# Altium PCB HIGHSPEED_v0.PcbDoc (part 1 of 2)
Units mil, origin at the board's own origin, x right, y up, seen from the top; angles counter-clockwise.
Board outline 3290 x 2886.02 mil, 6 copper layers (Top Layer, GND_1, Signal Layer 1, POWER, GND_2, Bottom Layer), stack 61.654 mil thick; 160 components, 145 nets, 569 pads, 305 vias.
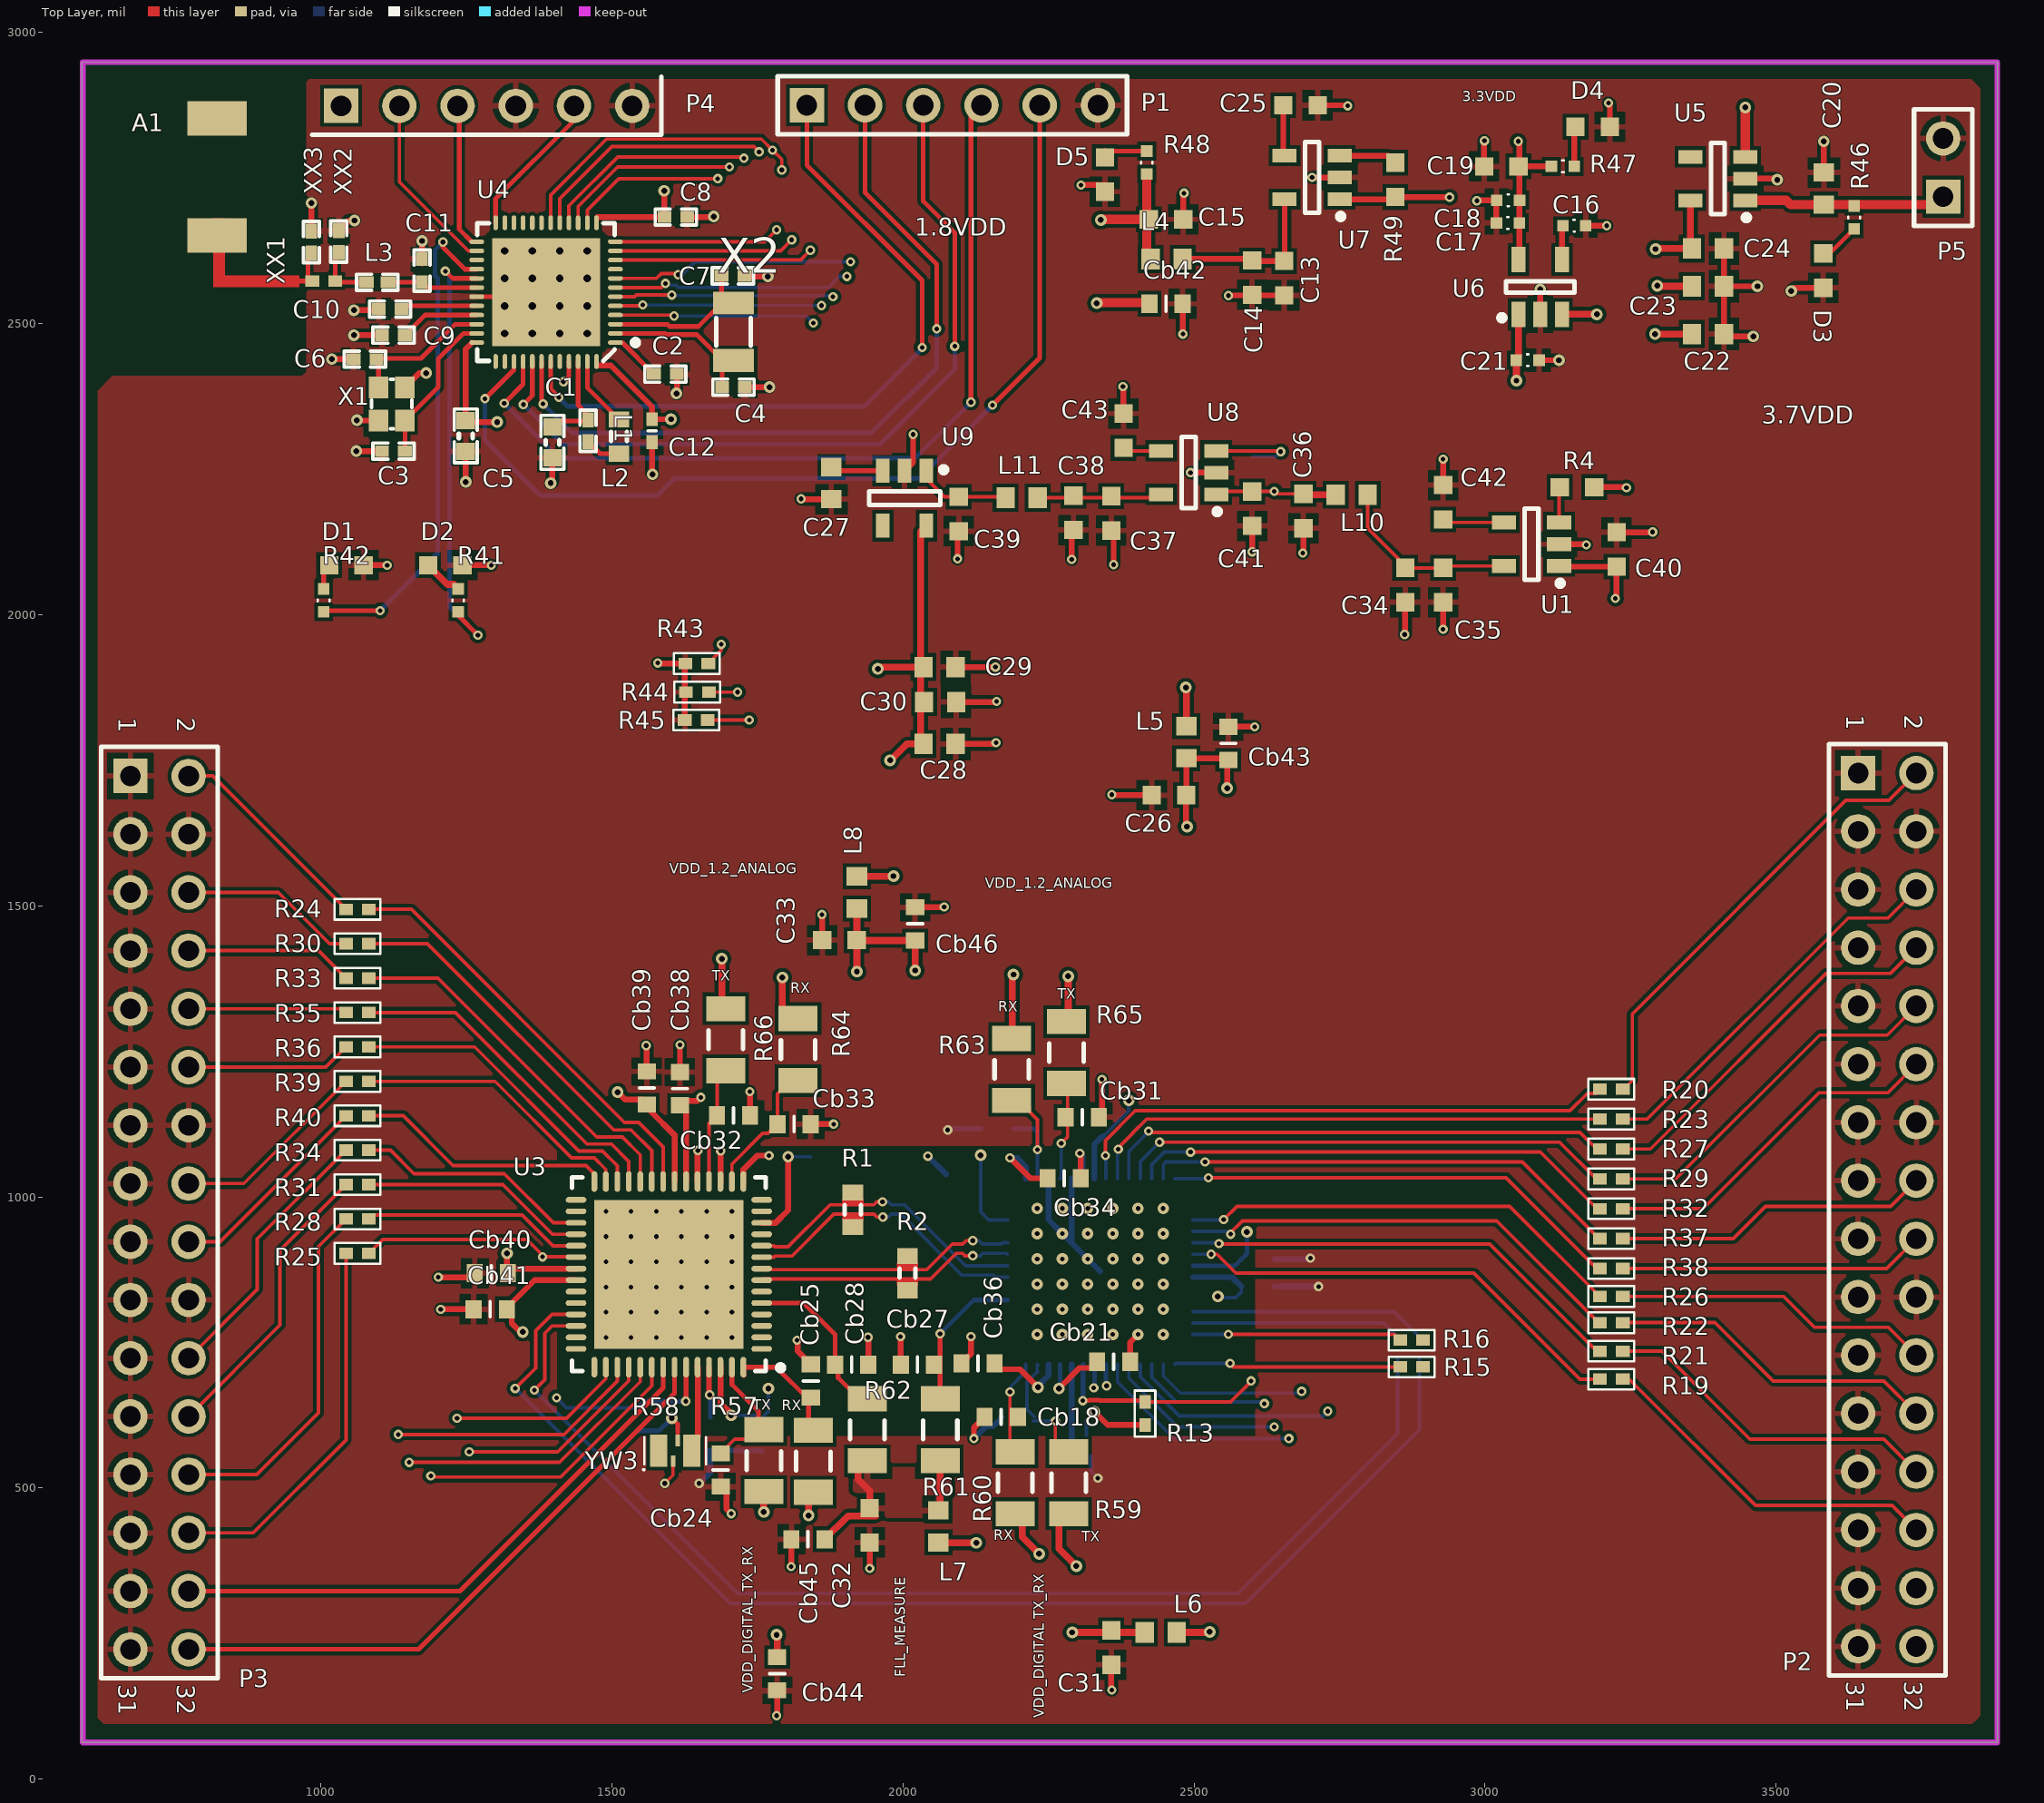
[diagram p0: Top Layer view]
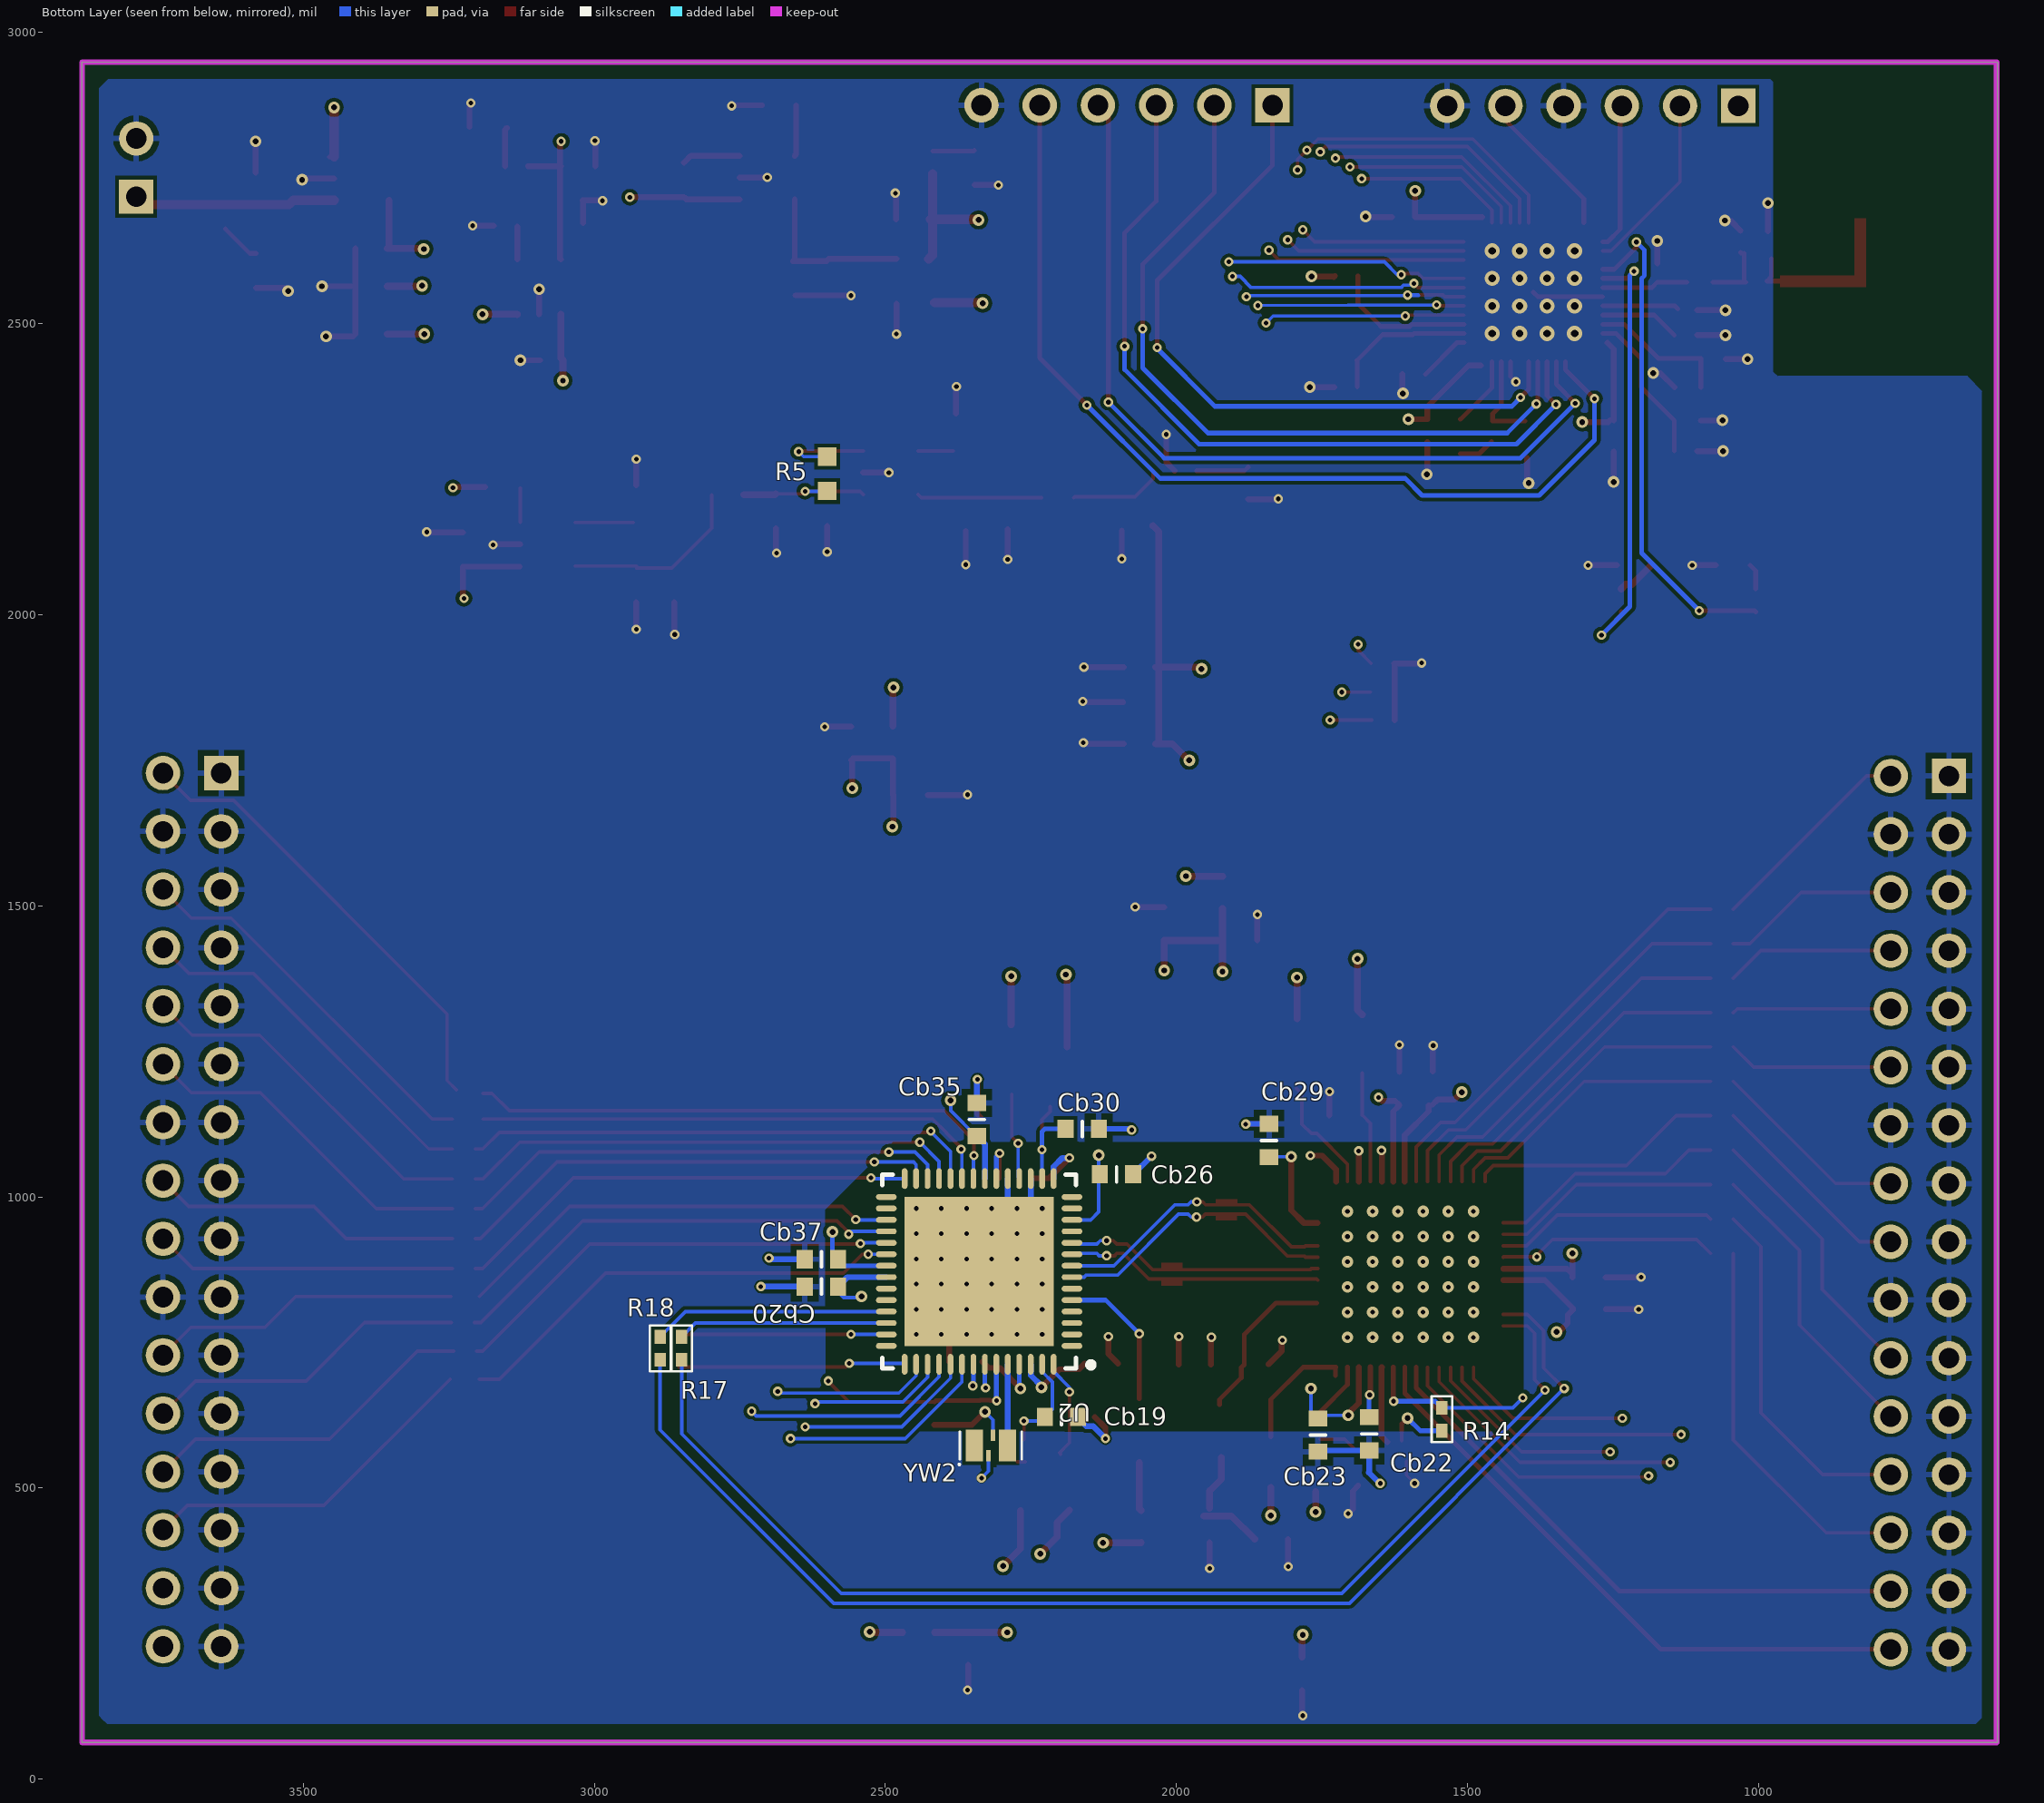
[diagram p1: Bottom Layer view, seen from below]
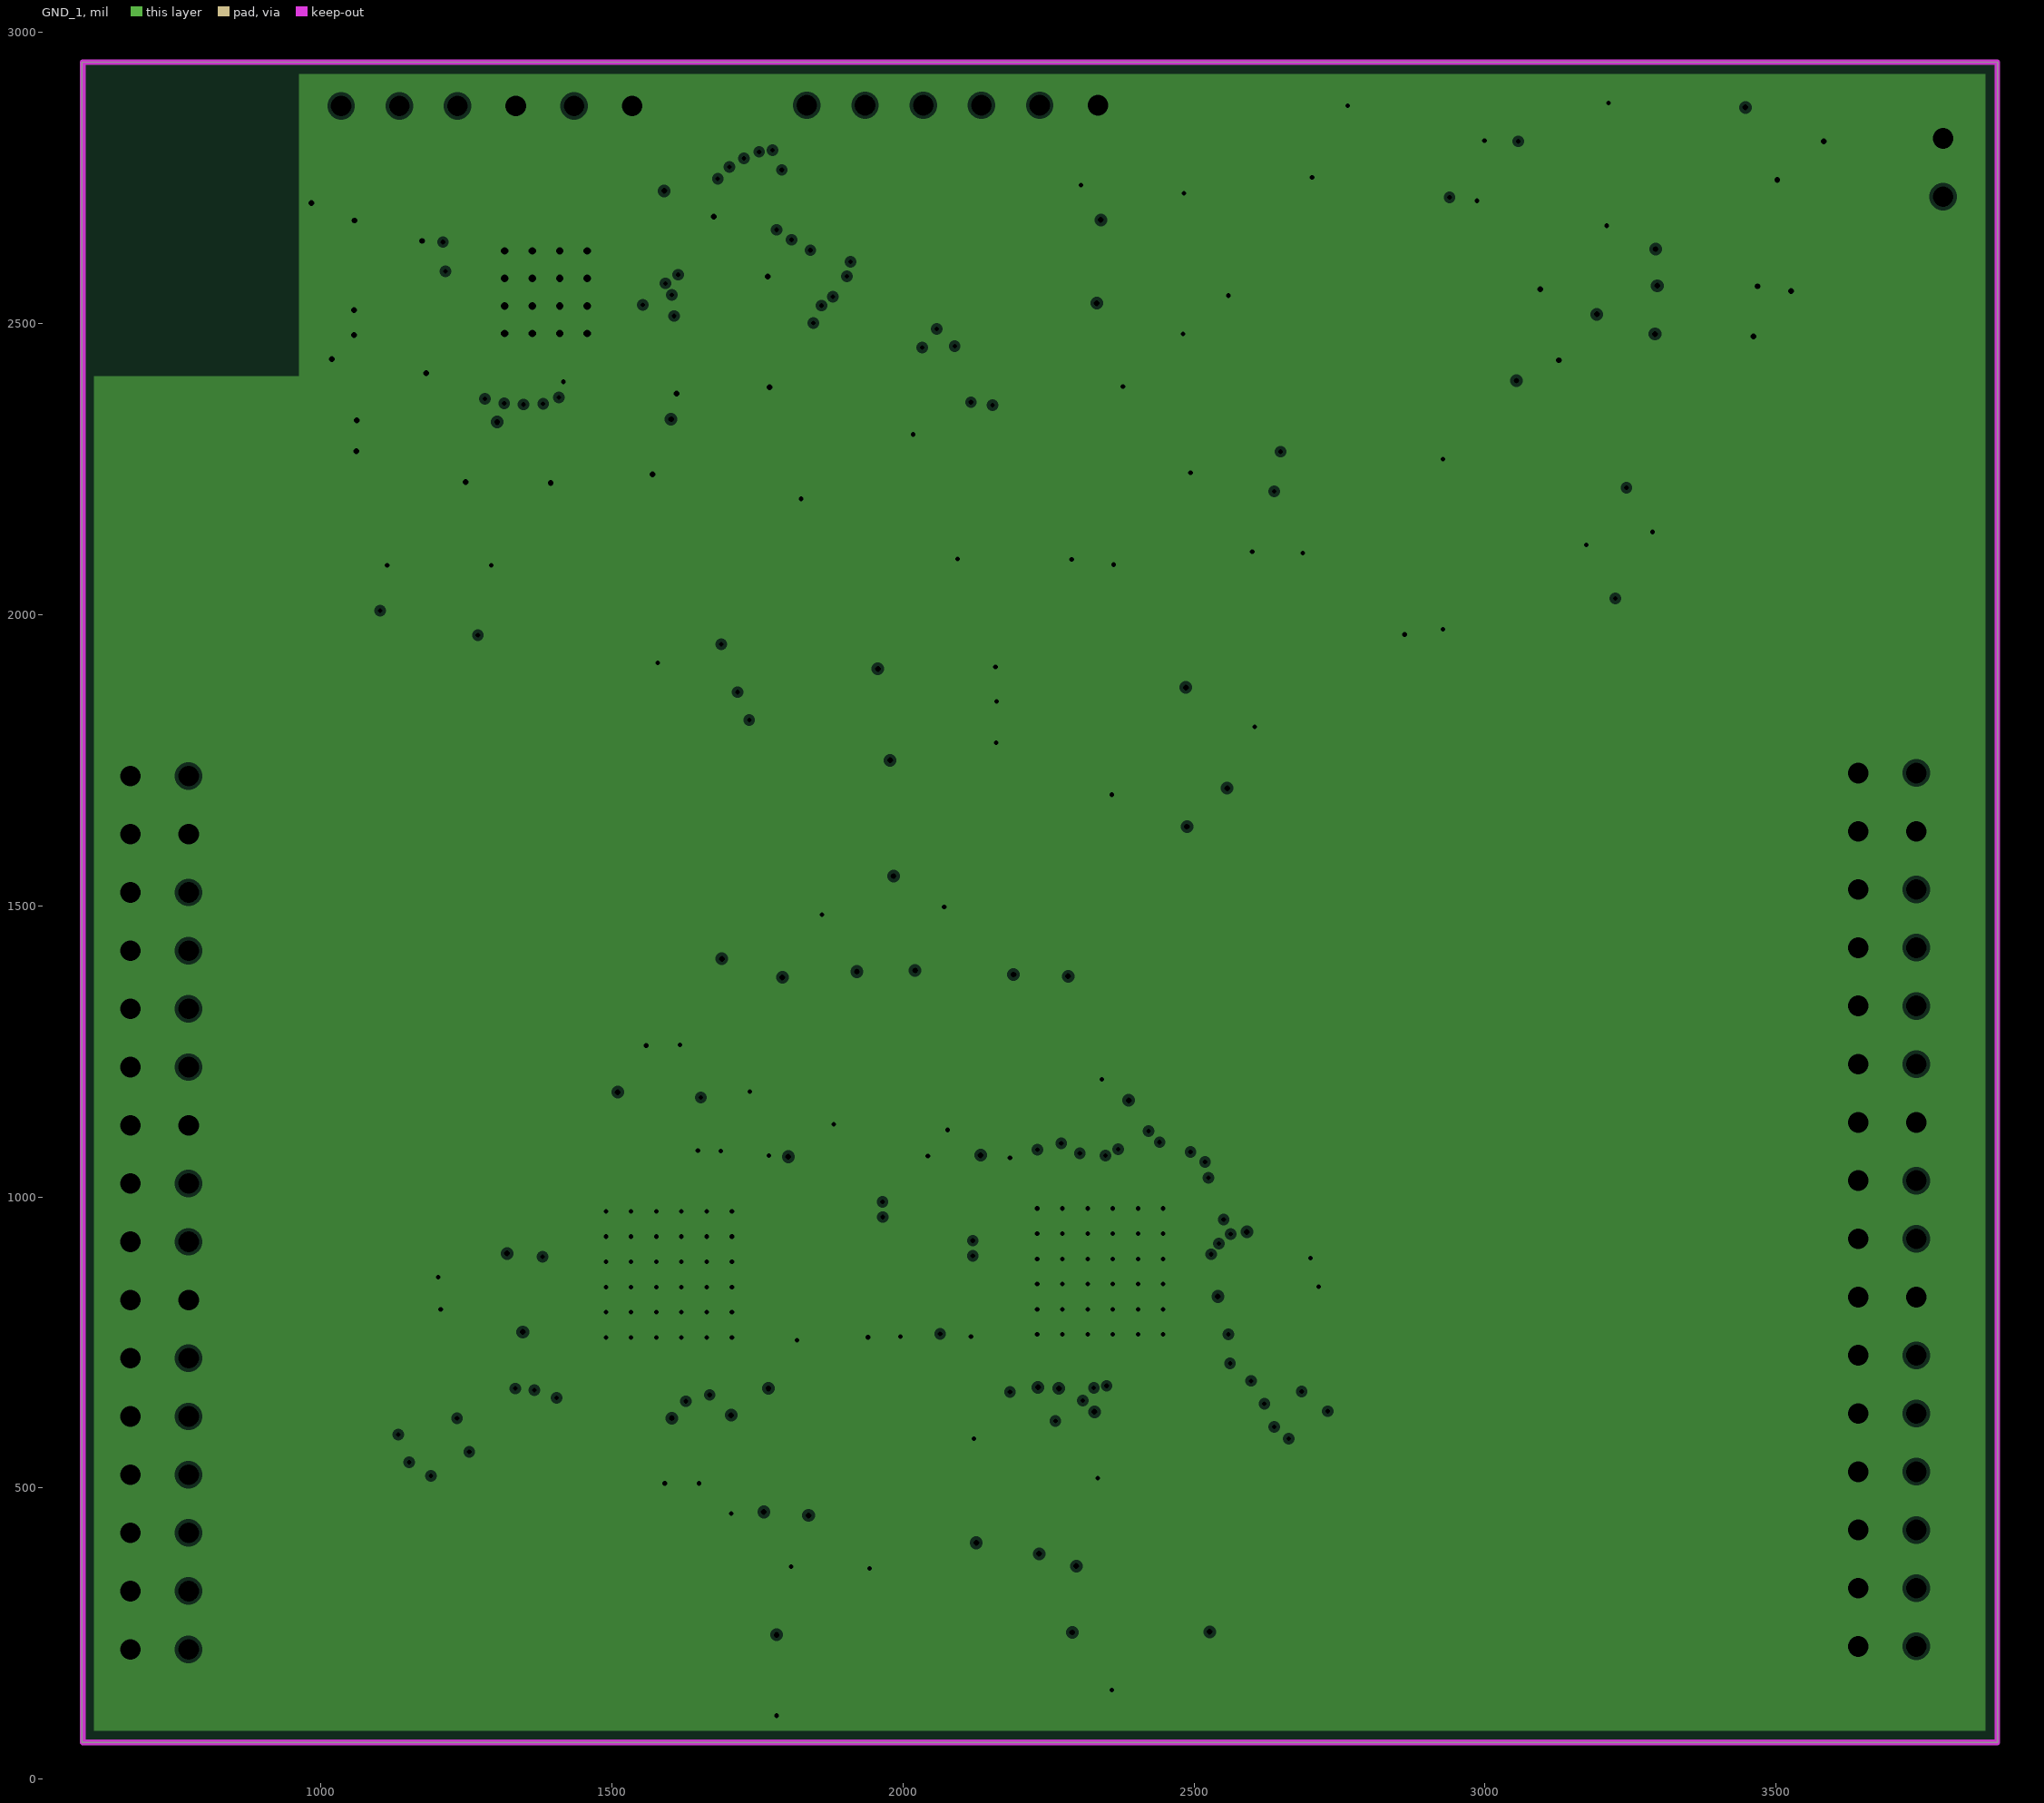
[diagram p2: GND_1, clearances drawn from the general rule]
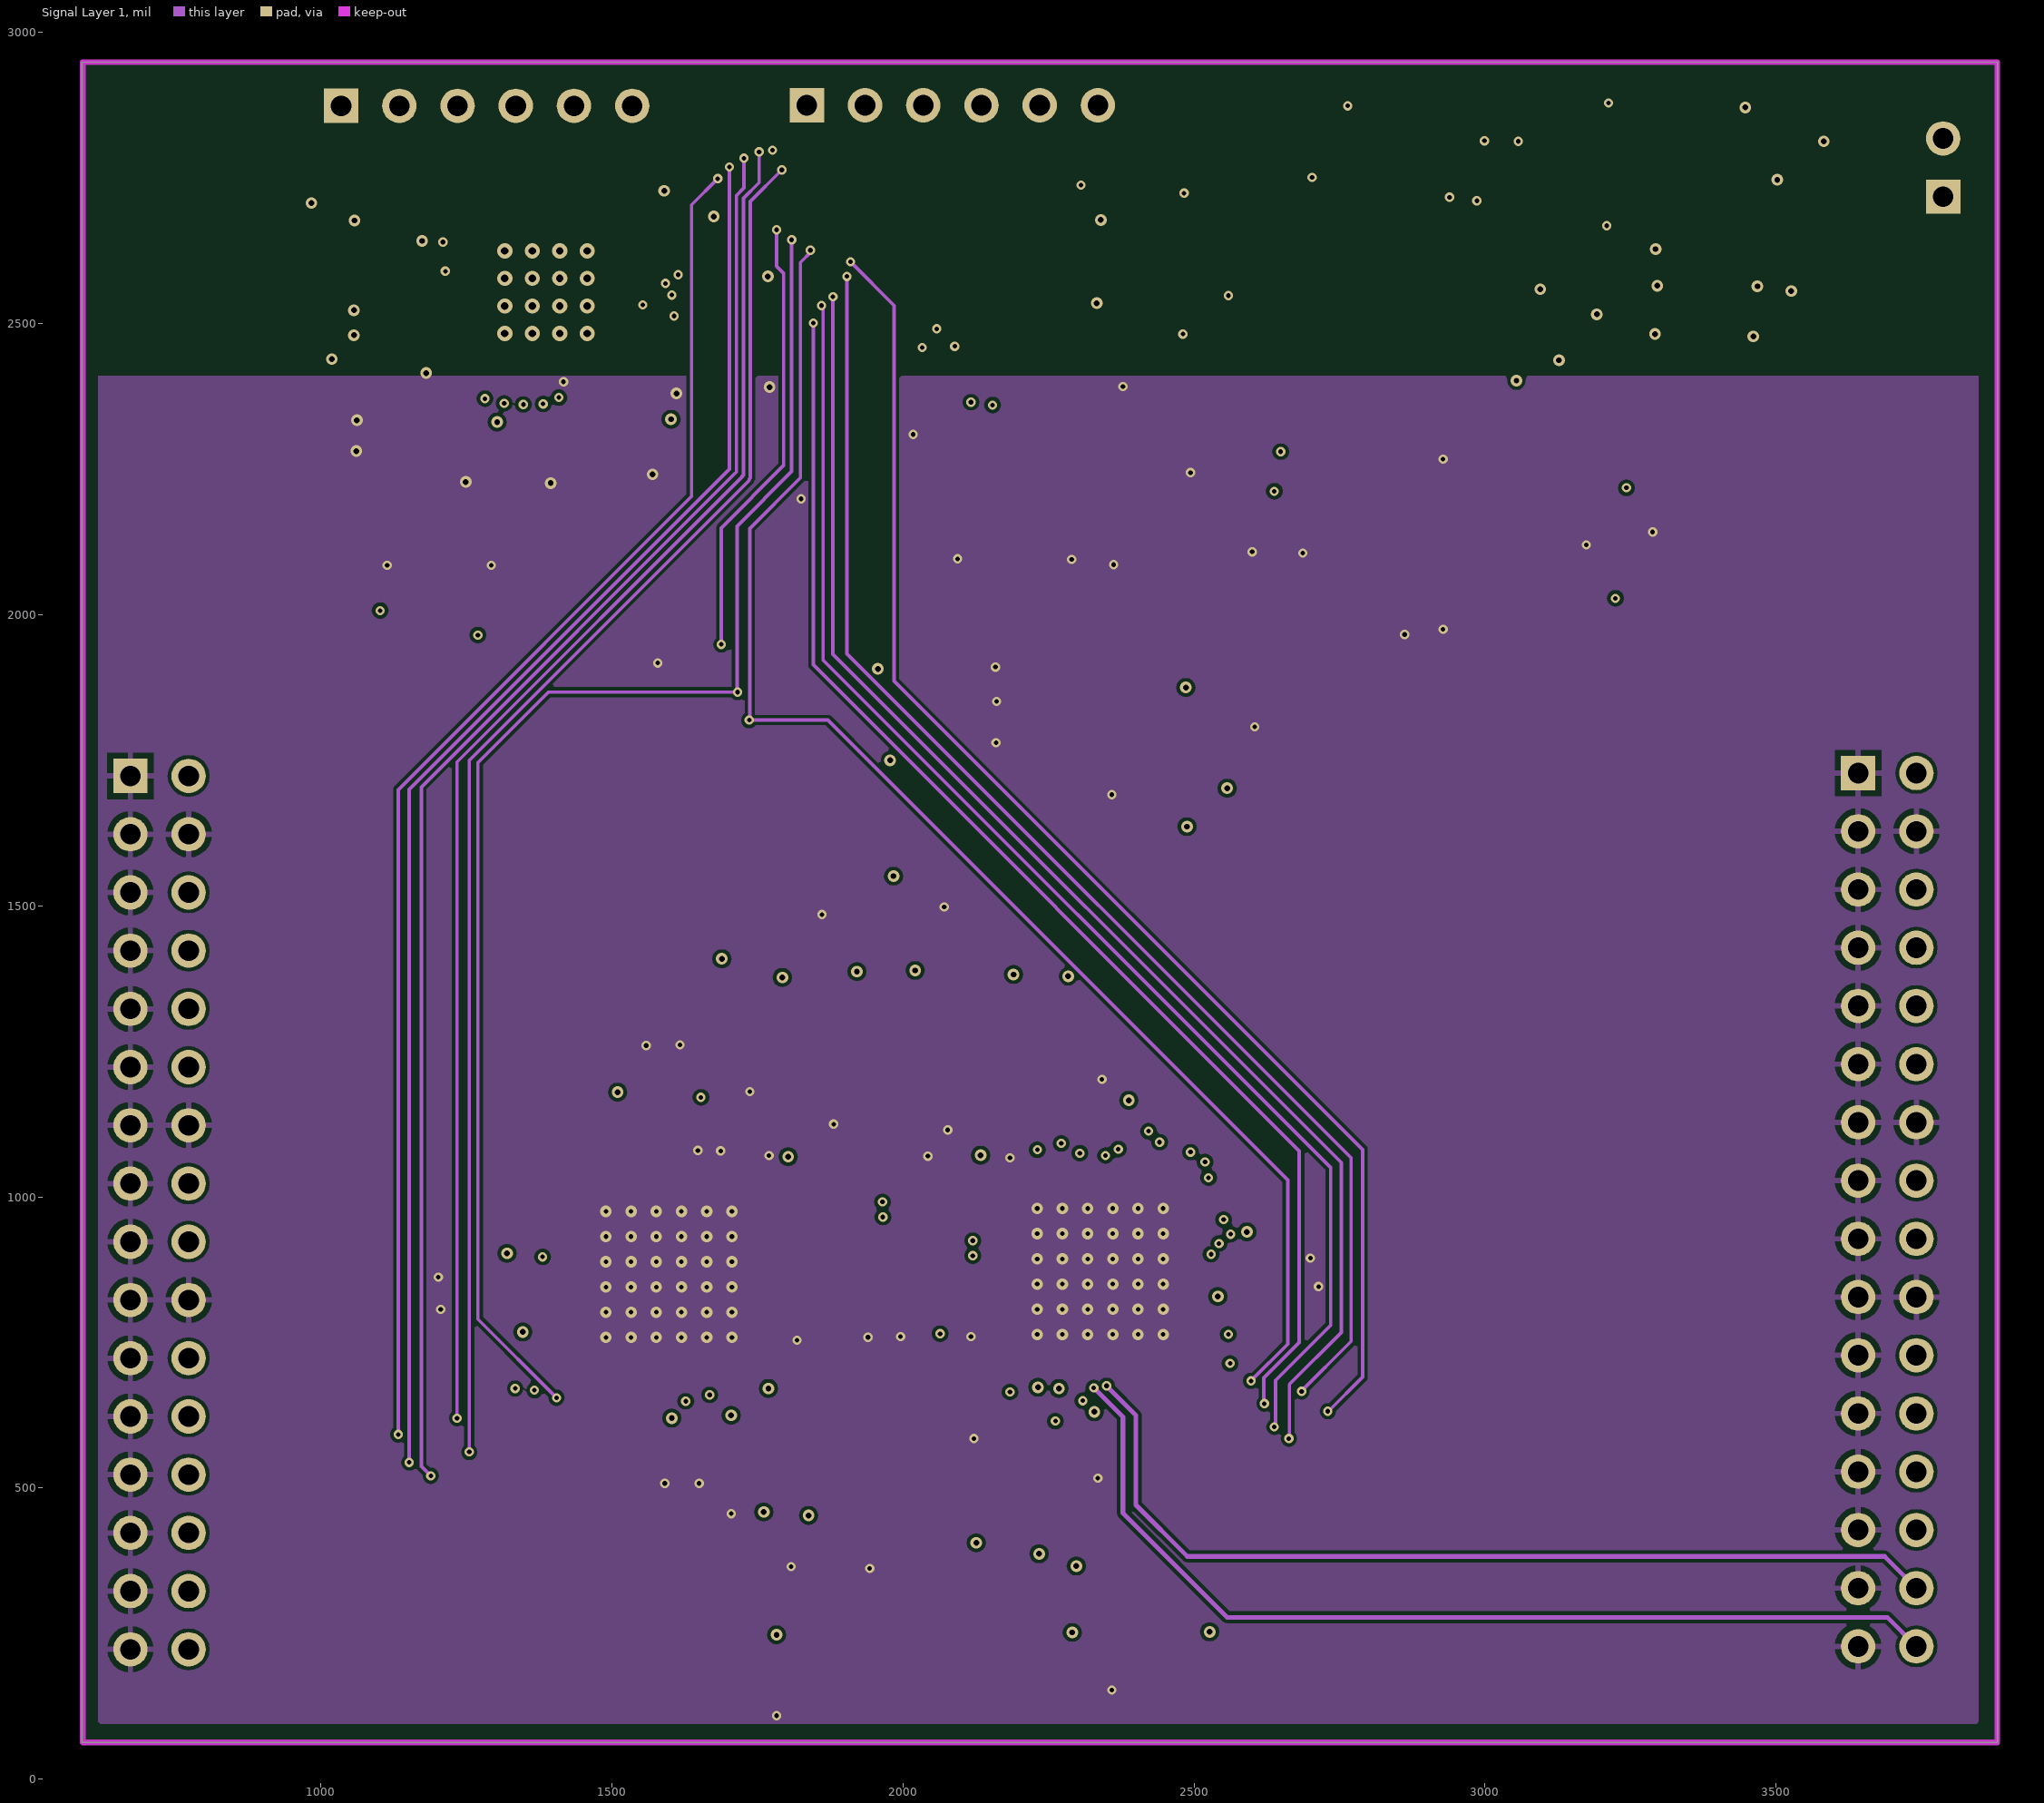
[diagram p3: Signal Layer 1]
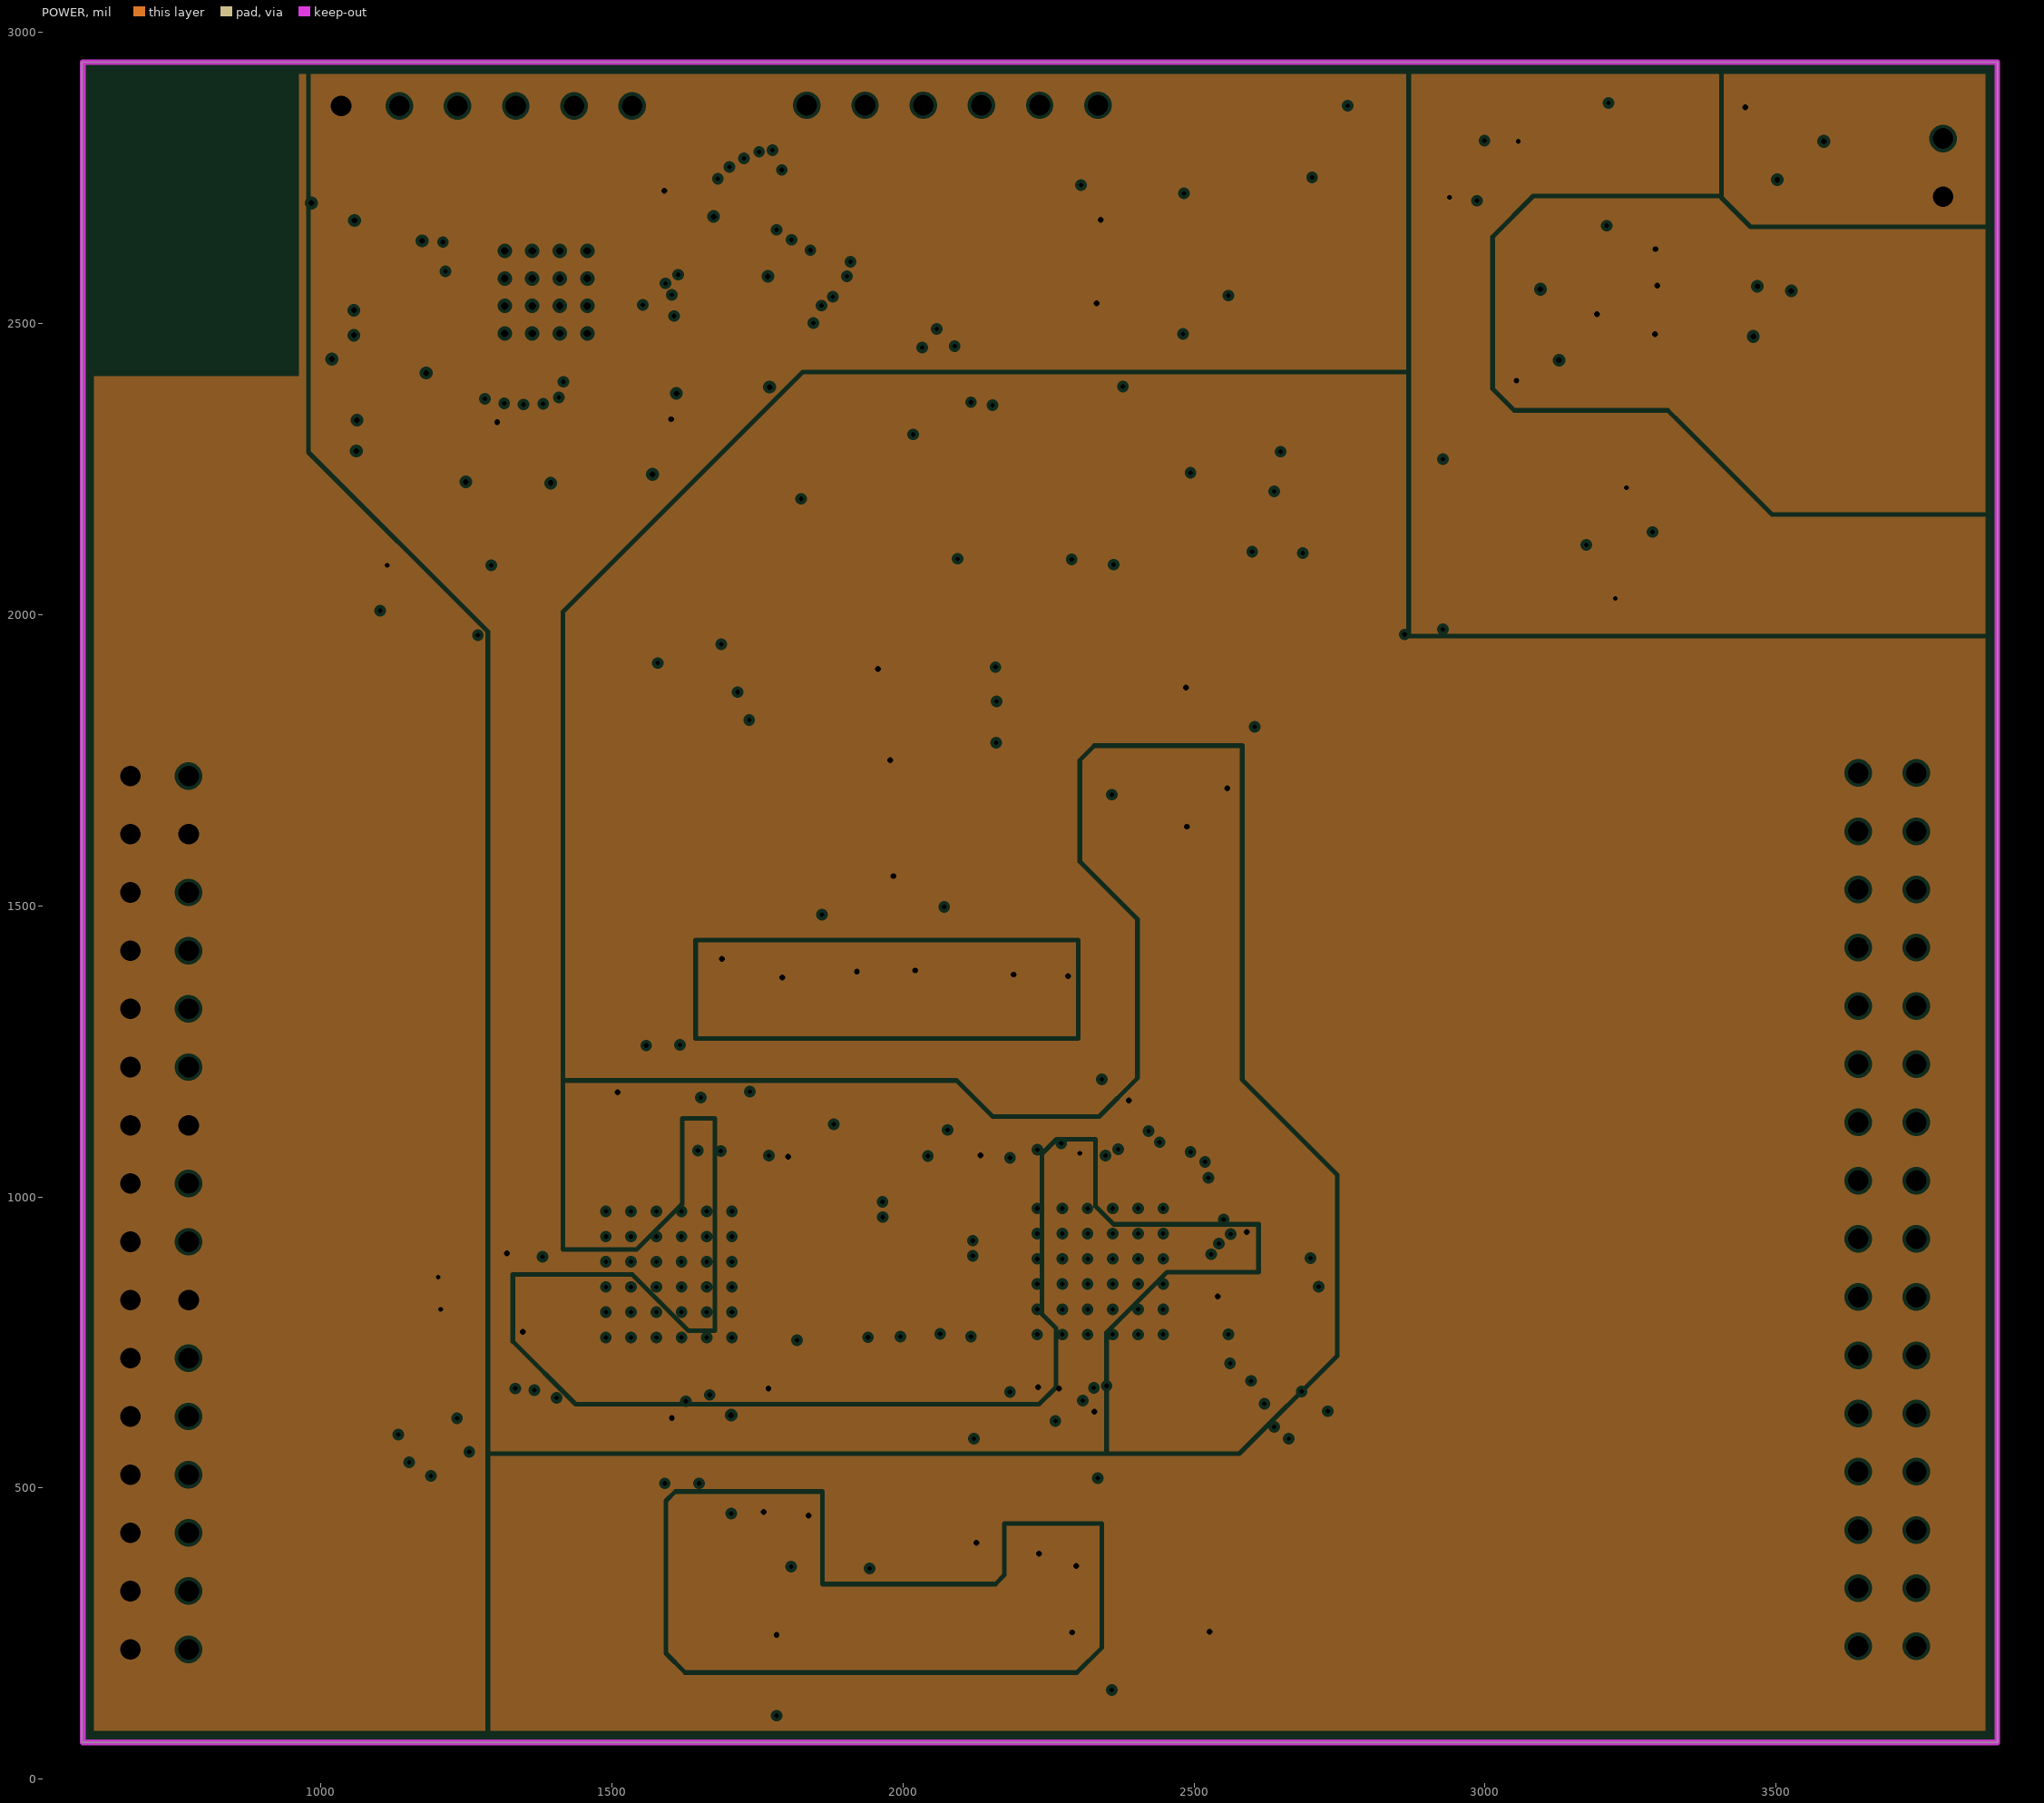
[diagram p4: POWER, clearances drawn from the general rule]
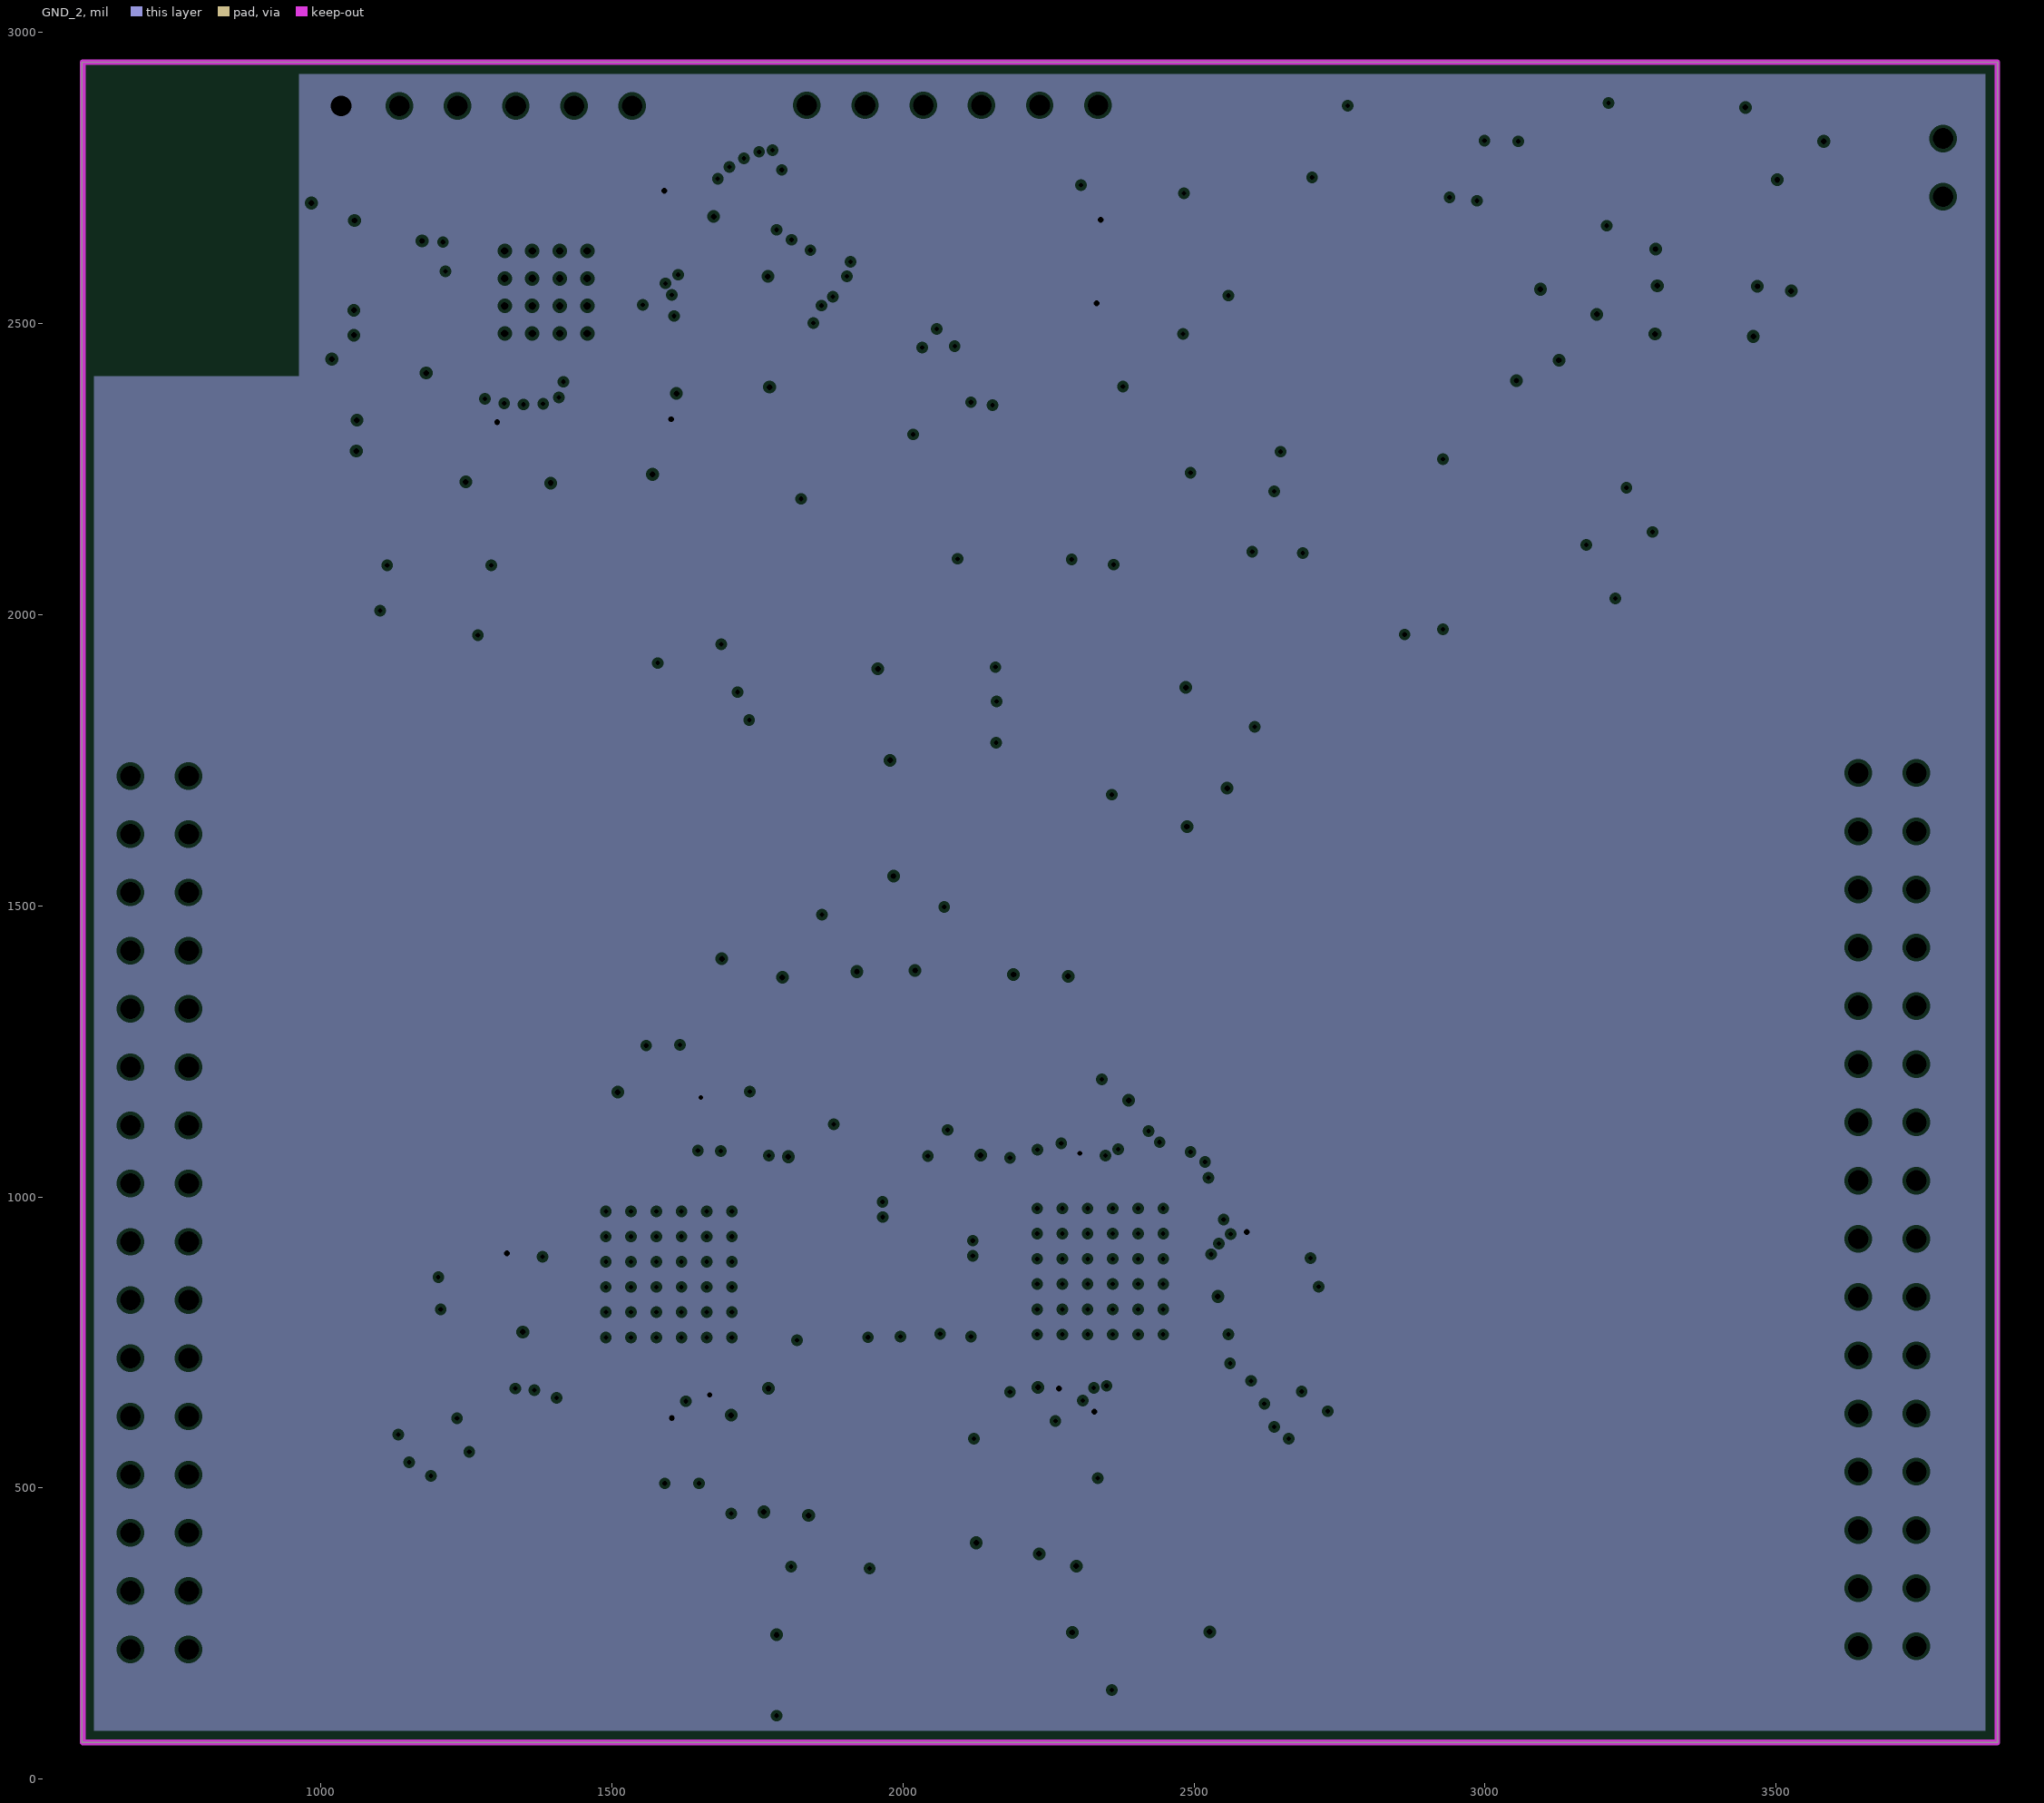
[diagram p5: GND_2, clearances drawn from the general rule]

## Layer stack, top to bottom
Top Solder: solder mask 0.4, Solder Resist, Dk 3.5
Top Layer: signal copper 1.378
Dielectric 1: prepreg 7.2835, FR-4, Dk 4.2
GND_1: plane copper 1.378, net GND
Dielectric 6: core 15.748, FR-4, Dk 4.2
Signal Layer 1: signal copper 1.4173
Dielectric 8: prepreg 7.2835, Dk 4.2
POWER: plane copper 1.378, net (Multiple Nets)
Dielectric 7: core 15.748, FR-4, Dk 4.2
GND_2: plane copper 1.378, net VDD_1V8
Dielectric 5: prepreg 7.2835, Dk 4.2
Bottom Layer: signal copper 1.378
Bottom Solder: solder mask 0.4, Solder Resist, Dk 3.5

## Board outline
3880,2949.02 3880,63 590,63 590,2949

## Design rules (kind name [scope] priority, off if disabled: settings)
Clearance mdPadClassTrack [InPadClass('Pad_Class') vs IsTrack] p1: gap=4
Clearance Keepout [IsKeepOut] p2: gap=4
Clearance mdViaVia [IsVia vs IsVia] p3: gap=6
Clearance mdPadVia [IsPad vs IsVia] p4: gap=6
Clearance mdPadPad [IsPad vs IsPad] p5: gap=6
Clearance mdWireVia [(InLayerClass('Signal Layers') AND IsTrack) vs IsVia] p6: gap=6
Clearance mdWirePad [(InLayerClass('Signal Layers') AND IsTrack) vs IsPad] p7: gap=6
Clearance mdWireWire [(InLayerClass('Signal Layers') AND IsTrack) vs (InLayerClass('Signal Layers') AND IsTrack)] p8: gap=6
Clearance [All] p9: gap=6
ComponentClearance [All] p1: gap=5 collisioncheckmode=3 verticalgap=5 showdistances=FALSE
DiffPairsRouting [All] p1: maxlimit=11 minlimit=9.8 mostfreqgap=10 toplayer_minwidth=6 toplayer_maxwidth=6 toplayer_prefwidth=6 midlayer1_minwidth=6 midlayer1_maxwidth=6 midlayer1_prefwidth=6 bottomlayer_minwidth=6 bottomlayer_maxwidth=6 bottomlayer_prefwidth=6 maxuncoupledlength=50
HoleSize [All] p1: absolutevalues=TRUE maxlimit=100000 minlimit=2 maxpercent=80.000 minpercent=20.000
HoleToHoleClearance [All] p1: gap=4 allowstackedmicrovias=TRUE
MinimumSolderMaskSliver [All] p1 off: minsoldermaskwidth=2
PlaneClearance [All] p1: clearance=6
PlaneConnect [All] p1: planeconnectstyle=Direct reliefexpansion=20 reliefentries=4 reliefconductorwidth=10 reliefairgap=10
PolygonConnect ThermalVias [IsVia] p1: connectstyle=Direct reliefconductorwidth=10 reliefentries=4 polygonreliefangle="90 Angle" airgapwidth=10
PolygonConnect [All] p2: connectstyle=Relief reliefconductorwidth=10 reliefentries=4 polygonreliefangle="90 Angle" airgapwidth=10
RoutingLayers RoutingLayers_4 [All] p1: top layer_v5=TRUE mid layer 1_v5=TRUE bottom layer_v5=TRUE
RoutingLayers [All] p2: top layer_v5=TRUE mid layer 1_v5=TRUE bottom layer_v5=TRUE
RoutingVias [All] p1: holewidth=8 width=16 viastyle="Through Hole" minholewidth=8 minwidth=16 maxholewidth=20 maxwidth=30
SilkToSilkClearance [All] p1 off: silktosilkclearance=10
SilkToSolderMaskClearance [IsPad] p1 off: minsilkscreentomaskgap=10 clearancetoexposedcopper=TRUE
SolderMaskExpansion [All] p1: expansion=2
UnpouredPolygon [All] p1: allowunpoured=FALSE
Width [All] p1: maxlimit=50 minlimit=6 preferedwidth=6 minimp=50.000000 maximp=50.000000 favimp=50.000000
19 further rules are at their usual default settings.

## Classes and differential pairs
pad class Pad_Class: COchg2-6 COchg2-7 COchg2-8 COchg2-9
component class HIGHSPEED_v0_SF2-POWER: C13 C14 C15 C16 C17 C18 C19 C20 C21 C22 C23 C24 C25 C26 C27 C28 C29 C30 C31 C32 C33 C34 C35 C36 C37 C38 C39 C40 C41 C42 C43 Cb42 Cb43 Cb44 Cb45 Cb46 D3 D4 D5 L4 L5 L6 L7 L8 L10 L11 P5 R4 R5 R46 R47 R48 R49 U1 U5 U6 U7 U8 U9
component class HIGHSPEED_v0_NM: Cb18 Cb19 Cb20 Cb21 Cb22 Cb23 Cb24 Cb25 Cb26 Cb27 Cb28 Cb29 Cb30 Cb31 Cb32 Cb33 Cb34 Cb35 Cb36 Cb37 Cb38 Cb39 Cb40 Cb41 P2 P3 R1 R2 R13 R14 R15 R16 R17 R18 R19 R20 R21 R22 R23 R24 R25 R26 R27 R28 R29 R30 R31 R32 R33 R34 R35 R36 R37 R38 R39 R40 R57 R58 R59 R60 R61 R62 R63 R64 R65 R66 U2 U3 YW2 YW3
component class HIGHSPEED_v0_RADIO: A1 C1 C2 C3 C4 C5 C6 C7 C8 C9 C10 C11 C12 D1 D2 L1 L2 L3 P1 P4 R41 R42 R43 R44 R45 SW U4 X1 X2 X4 XX1 XX2 XX3
differential pair TX: +TX_P -TX_N
differential pair RX: +RX_P -RX_N

## Components (designator, comment, footprint, x,y, rotation, side; value= is the part's Value field where it differs from the comment)
A1 "FR05-S1-N-0-102" ANTENNACHIP 822,2677 r90 top
C1 "1.0µF" CAPC1608X06L 1398,2296 r90 top
C2 "100nF" CAPC1005X04L 1592,2413 r0 top
C3 "12pF" CAPC1005X04L 1124.87,2281 r180 top
C4 "12pF" CAPC1005X04L 1709,2391 r0 top
C5 "4.7µF" CAPC1608X06L 1249,2307 r270 top
C6 "12pF" CAPC1005X04L 1076,2439 r180 top
C7 "12pF" CAPC1005X04L 1708,2582 r0 top
C8 "100nF" CAPC1005X04L 1610,2683 r0 top
C9 "100pF" CAPC1005X04L 1124.87,2480 r180 top
C10 "N.C." CAPC1005X04L 1119,2525 r0 top
C11 "0.8pF" CAPC1005X04L 1174,2591 r270 top
C12 "100nF" CAPC1005X04L 1569,2316 r270 top
C13 "Cap" 0603 2655,2578 r270 top
C14 "Cap" 0603 2600,2579 r270 top
C15 "Cap" 0603 2452,2679 r0 top
C16 "Cap" "cap_0402_R - modified" 3173,2668 r180 top
C17 "Cap" "cap_0402_R - modified" 3059,2673 r180 top
C18 "Cap" "cap_0402_R - modified" 3020,2712 r0 top
C19 "Cap" 0603 3028,2770 r180 top
C20 "Cap Semi" 1608[0603] 3582,2732 r270 top
C21 "Cap" "cap_0402_R - modified" 3093,2437 r180 top
C22 "Cap Semi" 1608[0603] 3383,2482 r180 top
C23 "Cap Semi" 1608[0603] 3383,2564 r180 top
C24 "Cap Semi" 1608[0603] 3383,2629 r180 top
C25 "" 0603 2683,2875 r0 top
C26 "Cap" 0603 2457,1690 r180 top
C27 "Cap Semi" 1608[0603] 1877,2226 r90 top
C28 "Cap Semi" 1608[0603] 2063,1778 r180 top
C29 "Cap Semi" 1608[0603] 2063,1910 r180 top
C30 "Cap Semi" 1608[0603] 2064,1850 r180 top
C31 "Cap" 0603 2358,226 r270 top
C32 "Cap" 0603 1943,436 r270 top
C33 "Cap" 0603 1891,1441 r180 top
C34 "Cap" 0603 2863,2051 r270 top
C35 "Cap" 0603 2928,2051 r270 top
C36 "Cap" 0603 2688,2178 r270 top
C37 "Cap" 0603 2358,2174 r270 top
C38 "Cap" 0603 2293,2175 r270 top
C39 "Cap" 0603 2096,2173 r270 top
C40 "Cap" 0603 3226,2112 r90 top
C41 "Cap" 0603 2600,2182 r270 top
C42 "" 0603 2928,2193 r90 top
C43 "" 0603 2379,2316 r90 top
Cb18 "GRM187R61A226ME15D" c0603-Murata-GR 2169,622 r0 top
Cb19 "GRM187R61A226ME15D" c0603-Murata-GR 2197.54,622 r0 bottom
Cb20 "GRM187R61A226ME15D" c0603-Murata-GR 2610,846 r180 bottom
Cb21 "GRM187R61A226ME15D" c0603-Murata-GR 2362,717 r180 top
Cb22 "GRM187R61A226ME15D" c0603-Murata-GR 1669,593 r90 bottom
Cb23 "GRM187R61A226ME15D" c0603-Murata-GR 1757,591 r90 bottom
Cb24 "GRM187R61A226ME15D" c0603-Murata-GR 1687,531 r90 top
Cb25 "GRM187R61A226ME15D" c0603-Murata-GR 1842,684 r270 top
Cb26 "GRM187R61A226ME15D" c0603-Murata-GR 2103,1039 r0 bottom
Cb27 "GRM187R61A226ME15D" c0603-Murata-GR 2025,712 r0 top
Cb28 "GRM187R61A226ME15D" c0603-Murata-GR 1912,712 r180 top
Cb29 "GRM187R61A226ME15D" c0603-Murata-GR 1841,1097 r270 bottom
Cb30 "GRM187R61A226ME15D" c0603-Murata-GR 2162,1117 r0 bottom
Cb31 "GRM187R61A226ME15D" c0603-Murata-GR 2308,1137 r180 top
Cb32 "GRM187R61A226ME15D" c0603-Murata-GR 1709,1140 r180 top
Cb33 "GRM187R61A226ME15D" c0603-Murata-GR 1813,1125 r180 top
Cb34 "GRM187R61A226ME15D" c0603-Murata-GR 2277,1032 r0 top
Cb35 "GRM187R61A226ME15D" c0603-Murata-GR 2343,1133 r270 bottom
Cb36 "GRM187R61A226ME15D" c0603-Murata-GR 2129,714 r0 top
Cb37 "GRM187R61A226ME15D" c0603-Murata-GR 2610,893 r180 bottom
Cb38 "GRM187R61A226ME15D" c0603-Murata-GR 1617,1186 r270 top
Cb39 "GRM187R61A226ME15D" c0603-Murata-GR 1560,1187 r270 top
Cb40 "GRM187R61A226ME15D" c0603-Murata-GR 1293,869 r0 top
Cb41 "GRM187R61A226ME15D" c0603-Murata-GR 1291,807 r0 top
Cb42 "GRM187R61A226ME15D" c0603-Murata-GR 2452,2534 r180 top
Cb43 "GRM187R61A226ME15D" c0603-Murata-GR 2559,1779 r270 top
Cb44 "GRM187R61A226ME15D" c0603-Murata-GR 1784,181 r90 top
Cb45 "GRM187R61A226ME15D" c0603-Murata-GR 1837,412 r0 top
Cb46 "GRM187R61A226ME15D" c0603-Murata-GR 2021,1469 r270 top
D1 "LED3" 0603 1044,2085 r0 top
D2 "LED3" 0603 1214,2085 r0 top
D3 "LED3" 0603 3581,2591 r270 top
D4 "LED3" 0603 3185,2838 r0 top
D5 "LED3" 0603 2347,2756 r270 top
L1 "LQW15AN15NJ00D" INDC1005X04L 1459,2316 r270 top
L2 "L0603B100KDWFT" J1-0603 1512.39,2306 r90 top
L3 "3.9nH" INDC1005X04L 1097,2571 r180 top
L4 "Inductor" 1608[0603] 2453,2611 r180 top
L5 "Inductor" 1608[0603] 2487,1781 r270 top
L6 "Inductor" 1608[0603] 2443,252 r180 top
L7 "Inductor" 1608[0603] 2061,434 r90 top
L8 "Inductor" 1608[0603] 1921,1523 r270 top
L10 "Inductor" 1608[0603] 2771,2206 r180 top
L11 "Inductor" 1608[0603] 2204,2201 r180 top
P1 "Header 6" HDR1X6 1835,2875 r0 top
P2 "Header 16X2" HDR2X16 3641,1728 r270 top
P3 "Header 16X2" HDR2X16 673,1723 r270 top
P4 "Header 6" HDR1X6 1035,2874 r0 top
P5 "Header 2" HDR1X2 3787,2718 r90 top
R1 "0R" J1-0603 1914,978 r270 top
R2 "0R" J1-0603 2008,869 r270 top
R4 "" 0603 3158,2219 r0 top
R5 "" 0603 2600,2242 r270 bottom
R13 "NC" 0402 2416,628 r270 top
R14 "NC" 0402 1544,618 r270 bottom
R15 "0R" 0402 2874,708 r0 top
R16 "0R" 0402 2874,754 r0 top
R17 "0R" 0402 2850,740 r270 bottom
R18 "0R" 0402 2887,740 r270 bottom
R19 "0R" 0402 3216.99,687 r0 top
R20 "0R" 0402 3216.99,1185 r0 top
R21 "0R" 0402 3216.99,735 r0 top
R22 "0R" 0402 3216.99,784 r0 top
R23 "0R" 0402 3216.99,1133.67 r0 top
R24 "0R" 0402 1063,1493.95 r180 top
R25 "0R" 0402 1063,903 r0 top
R26 "0R" 0402 3216.99,829 r0 top
R27 "0R" 0402 3216.99,1082.33 r0 top
R28 "0R" 0402 1063,962.09 r0 top
R29 "0R" 0402 3216.99,1031 r0 top
R30 "0R" 0402 1063,1434.85 r180 top
R31 "0R" 0402 1063,1021.19 r0 top
R32 "0R" 0402 3216.99,979.67 r0 top
R33 "0R" 0402 1063,1375.76 r180 top
R34 "0R" 0402 1063,1080.28 r0 top
R35 "0R" 0402 1063,1316.66 r180 top
R36 "0R" 0402 1063,1257.57 r180 top
R37 "0R" 0402 3216.99,928.33 r0 top
R38 "0R" 0402 3216.99,877 r0 top
R39 "0R" 0402 1063,1198.47 r180 top
R40 "0R" 0402 1063,1139.38 r180 top
R41 "Res3" "res_0402_R - modified" 1236,2005 r90 top
R42 "Res3" "res_0402_R - modified" 1005,2005 r90 top
R43 "0R" 0402 1646,1916 r180 top
R44 "0R" 0402 1647,1867 r180 top
R45 "0R" 0402 1645,1819 r180 top
R46 "Res3" "res_0402_R - modified" 3634,2702 r270 top
R47 "Res3" "res_0402_R - modified" 3114,2770 r0 top
R48 "Res3" "res_0402_R - modified" 2419,2757 r90 top
R49 "" 0603 2846,2747 r270 top
R57 "0R" C1206 1846,546 r90 top
R58 "0R" C1206 1761,547 r90 top
R59 "0R" C1206 2285,509 r90 top
R60 "0R" C1206 2193,509 r90 top
R61 "0R" C1206 2064,600 r90 top
R62 "0R" C1206 1939,600 r270 top
R63 "0R" C1206 2187,1219 r90 top
R64 "0R" C1206 1820,1253 r270 top
R65 "0R" C1206 2281,1248 r270 top
R66 "0R" C1206 1696,1270 r270 top
U1 "TPS73218" "SOT23__DDC__(R - PDSO-  G5)" 3080,2121 r180 top
U2 "PLINK" QFN56_M 2339,872 r0 bottom
U3 "PLINK" QFN56_M 1598,867 r180 top
U4 "nRF52832-QFAA" QFN40P600X600X90-48N 1387,2554 r180 top
U5 "TLV70237" "SOT23__DDC__(R - PDSO-  G5)" 3400,2749 r180 top
U6 "TPS79333" "SOT_23__DBV_(R - PDSO - G5)" 3095,2563 r90 top
U7 "TPS73218" "SOT23__DDC__(R - PDSO-  G5)" 2703,2751 r180 top
U8 "TPS73218" "SOT23__DDC__(R - PDSO-  G5)" 2491,2244 r180 top
U9 "LP5907QMFX-1.2" "SOT23__DDC__(R - PDSO-  G5)" 2003,2200 r270 top
X1 "FA-128 32.0000MF10Z-AJ3-ND" BT-XTAL_2016 1121.94,2362 r270 top
X2 "ABS07AIG-32.768kHz-9-1-T" XTAL_3215 1709,2486 r90 top
XX1 "0" 0402 1005.13,2573 r180 top
XX2 "NC" INDC1005X04L 1031,2641 r90 top
XX3 "NC" INDC1005X04L 984,2640 r90 top
YW2 "SIT1533AC-H5-DCC-32.768E" SiT1533-C 2319,573 r180 bottom
YW3 "SIT1533AC-H5-DCC-32.768E" SiT1533-C 1609,564 r0 top

## Footprints (in the part's own frame and the unit in brackets; to place one, negate y for a bottom-side part, rotate by r counter-clockwise, add the part's x,y. Pads: shape width x height; smd on the part's side, far side on the other; paste and mask are expansions set on the pad)
0402 [mm] "Chip Capacitor, Body 1.0x0.5mm, IPC High Density"
  rect 0.6x0.5 smd: 1(-0.5,0) 2(0.5,0)
  silkscreen extent -1,-0.45 1,0.45, body extent -0.55,-0.3 0.55,0.3, height 1.3
0603 [mm]
  rect 0.8x0.8 smd: 1(-0.75,0) 2(0.75,0)
1608[0603] [mm] "Chip Capacitor, Body 1.6x0.8mm, IPC High Density"
  rect 0.8x0.9 smd: 1(-0.7,0) 2(0.7,0)
  body extent -0.87,-0.48 0.87,0.48, height 1.3
ANTENNACHIP [mm] "Chip ANTENNA SMD"
  rect 1.5x2.6 smd: 1(-0.65,0) 2(4.45,0)
BT-XTAL_2016 [mm]
  rect 0.95x0.85 smd: 1(-0.725,-0.575) 2(0.725,-0.575) 3(0.725,0.575) 4(-0.725,0.575)
  silkscreen extent -1.08,-0.88 1.08,0.88, body extent -1.05,-0.85 1.05,0.85, height 0.56
c0603-Murata-GR [mm] "Murata GR-series 0603 capacitor"
  rect 0.7x0.8 smd: 1(-0.725,0) 2(0.725,0)
  silkscreen extent 0,-0.33 0,0.33, body extent -0.8,-0.4 0.8,0.4, height 0.8
C1206 [mm] "Chip Capacitor, Body 3.2x1.6mm, IPC High Density"
  rect 1.1x1.7 smd: 1(-1.35,0) 2(1.35,0)
  silkscreen extent -0.4,-0.75 0.4,0.75, body extent -1.7,-0.9 1.7,0.9, height 1.3
"cap_0402_R - modified" [mm] "0402_R"
  rect 0.5x0.5 smd paste-0.05: 1(0,0) 2(1,0)
  silkscreen extent 0.47,-0.26 0.53,0.25, body extent -0.13,-0.25 1.14,0.25, height 0.5
CAPC1005X04L [mm]
  rect 0.6x0.5 smd: 1(-0.5,0) 2(0.5,0)
  silkscreen extent -0.9,-0.35 0.9,0.35, body extent -0.51,-0.25 0.51,0.25, height 0.5
CAPC1608X06L [mm]
  rect 0.75x0.8 smd: 1(-0.675,0) 2(0.675,0)
  silkscreen extent -1.17,-0.5 1.17,0.5, body extent -0.8,-0.43 0.8,0.43, height 0.8
HDR1X2 [mm] "Connector; Header; 2 Position"
  rect 1.5x1.5 hole 0.9: 1(0,0)
  round 1.5 hole 0.9: 2(2.54,0)
  silkscreen extent -1.27,-1.27 3.81,1.27
HDR1X6 [mm] "Connector; Header; 6 Position"
  rect 1.5x1.5 hole 0.9: 1(0,0)
  round 1.5 hole 0.9: 2(2.54,0) 3(5.08,0) 4(7.62,0) 5(10.16,0) 6(12.7,0)
  silkscreen extent -1.27,-1.27 13.97,1.27
HDR2X16 [mm] "Connector; Header; 16x2 Position"
  rect 1.5x1.5 hole 0.9: 1(0,0)
  round 1.5 hole 0.9: 2(0,2.54) 3(2.54,0) 4(2.54,2.54) 5(5.08,0) 6(5.08,2.54) 7(7.62,0) 8(7.62,2.54) 9(10.16,0) 10(10.16,2.54) 11(12.7,0) 12(12.7,2.54) 13(15.24,0) 14(15.24,2.54) 15(17.78,0) 16(17.78,2.54) 17(20.32,0) 18(20.32,2.54) 19(22.86,0) 20(22.86,2.54) 21(25.4,0) 22(25.4,2.54) 23(27.94,0) 24(27.94,2.54) 25(30.48,0) 26(30.48,2.54) 27(33.02,0) 28(33.02,2.54) 29(35.56,0) 30(35.56,2.54) 31(38.1,0) 32(38.1,2.54)
  silkscreen extent -1.27,-1.27 39.37,3.81
INDC1005X04L [mm]
  rect 0.65x0.5 smd: 1(-0.475,0) 2(0.475,0)
  silkscreen extent -0.9,-0.35 0.9,0.35, body extent -0.5,-0.3 0.5,0.3, height 0.5
J1-0603 [mm] "Chip Resistor, Body 1.6x0.8mm, IPC High Density"
  rect 0.7x0.9 smd: 1(-0.75,0) 2(0.75,0)
  silkscreen extent -0.2,-0.35 0.2,0.35, body extent -0.85,-0.48 0.85,0.48, height 0.9
QFN40P600X600X90-48N [mm]
  oval 0.65x0.2 smd: 1(-3.025,2.2) 2(-3.025,1.8) 3(-3.025,1.4) 4(-3.025,1) 5(-3.025,0.6) 6(-3.025,0.2) 7(-3.025,-0.2) 8(-3.025,-0.6) 9(-3.025,-1) 10(-3.025,-1.4) 11(-3.025,-1.8) 12(-3.025,-2.2) 25(3.025,-2.2) 26(3.025,-1.8) 27(3.025,-1.4) 28(3.025,-1) 29(3.025,-0.6) 30(3.025,-0.2) 31(3.025,0.2) 32(3.025,0.6) 33(3.025,1) 34(3.025,1.4) 35(3.025,1.8) 36(3.025,2.2)
  oval 0.2x0.65 smd: 13(-2.2,-3.025) 14(-1.8,-3.025) 15(-1.4,-3.025) 16(-1,-3.025) 17(-0.6,-3.025) 18(-0.2,-3.025) 19(0.2,-3.025) 20(0.6,-3.025) 21(1,-3.025) 22(1.4,-3.025) 23(1.8,-3.025) 24(2.2,-3.025) 37(2.2,3.025) 38(1.8,3.025) 39(1.4,3.025) 40(1,3.025) 41(0.6,3.025) 42(0.2,3.025) 43(-0.2,3.025) 44(-0.6,3.025) 45(-1,3.025) 46(-1.4,3.025) 47(-1.8,3.025) 48(-2.2,3.025)
  rect 4.7x4.7 smd: 49(0,0)
  silkscreen extent -4.03,-3 3,3, body extent -3.02,-3.02 3.02,3.02, height 0.86
QFN56_M [mm] "QFN, 56-Leads, Body 8x8mm, Pitch 0.5mm, Thermal Pad 6.5x6.5mm, IPC Low Density"
  oval 0.9x0.25 smd: 1(-4.05,3.25) 2(-4.05,2.75) 3(-4.05,2.25) 4(-4.05,1.75) 5(-4.05,1.25) 6(-4.05,0.75) 7(-4.05,0.25) 8(-4.05,-0.25) 9(-4.05,-0.75) 10(-4.05,-1.25) 11(-4.05,-1.75) 12(-4.05,-2.25) 13(-4.05,-2.75) 14(-4.05,-3.25) 29(4.05,-3.25) 30(4.05,-2.75) 31(4.05,-2.25) 32(4.05,-1.75) 33(4.05,-1.25) 34(4.05,-0.75) 35(4.05,-0.25) 36(4.05,0.25) 37(4.05,0.75) 38(4.05,1.25) 39(4.05,1.75) 40(4.05,2.25) 41(4.05,2.75) 42(4.05,3.25)
  oval 0.25x0.9 smd: 15(-3.25,-4.05) 16(-2.75,-4.05) 17(-2.25,-4.05) 18(-1.75,-4.05) 19(-1.25,-4.05) 20(-0.75,-4.05) 21(-0.25,-4.05) 22(0.25,-4.05) 23(0.75,-4.05) 24(1.25,-4.05) 25(1.75,-4.05) 26(2.25,-4.05) 27(2.75,-4.05) 28(3.25,-4.05) 43(3.25,4.05) 44(2.75,4.05) 45(2.25,4.05) 46(1.75,4.05) 47(1.25,4.05) 48(0.75,4.05) 49(0.25,4.05) 50(-0.25,4.05) 51(-0.75,4.05) 52(-1.25,4.05) 53(-1.75,4.05) 54(-2.25,4.05) 55(-2.75,4.05) 56(-3.25,4.05)
  rect 6.5x6.5 smd: 57(0,0)
  silkscreen extent -5,-4.23 4.23,4.23, body extent -4.08,-4.08 4.08,4.08, height 0.9
"res_0402_R - modified" [mm] "0402_R"
  rect 0.5x0.5 smd paste-0.05: 1(0,0) 2(1,0)
  silkscreen extent 0.46,-0.25 0.54,0.25, body extent -0.13,-0.25 1.14,0.25, height 0.3
SiT1533-C [mm] "Ultra-Low Power Quartz XTAL Replacement - XTAL Compatible Footprint"
  rect 0.75x1.4 smd: 1(-0.725,0) 3(0.725,0)
  rect 0.2x0.5 smd: 2(-0.1,-0.45) 4(0.1,0.45)
  silkscreen extent -1.4,-0.85 1.35,0.6, body extent -1,-0.6 1,0.6, height 0.55
"SOT23__DDC__(R - PDSO-  G5)" [mm]
  rect 1.05x0.6 smd: 1(-1.2,0.95) 2(-1.2,0) 3(-1.2,-0.95) 4(1.2,-0.95) 5(1.2,0.95)
  silkscreen extent -1.37,-1.55 0.3,1.83, body extent -0.87,-1.52 0.87,1.53, height 1.1
"SOT_23__DBV_(R - PDSO - G5)" [mm]
  rect 1.1x0.6 smd: 1(-1.2,0.95) 2(-1.2,0) 3(-1.2,-0.95) 4(1.2,-0.95) 5(1.2,0.95)
  silkscreen extent -1.47,-1.5 0.25,1.8, body extent -0.85,-1.5 0.85,1.5, height 1.45
XTAL_3215 [mm]
  rect 1x1.8 smd: 1(-1.25,0) 2(1.25,0)
  silkscreen extent -0.6,-0.75 0.6,0.75, body extent -1.6,-0.75 1.6,0.75, height 0.81

## Part data
A1: "Bluetooth antenna"
C1: library part C0603-1µ0, "Capacitor, X7R, ±10%"
C2 C8 C12: library part C0402-100n, "Capacitor, X7R, ±10%"
C3 C4 C6 C7: library part C0402-12p, "Capacitor, NP0, ±2%"
C5: library part C0603-4µ7, "Capacitor, X5R, ±10%"
C9: library part C0402-100p, "Capacitor, NP0, ±5%"
C10: library part C0402-N.C., "Not mounted"
C11: library part C0402-0.8p, "Capacitor, NP0, ±5%"
C13 C14 C15 C16 C17 C18 C19 C20 C21 C22 C23 C24 C26 C27 C28 C29 C30 C31 C32 C33 C34 C35 C36 C37 C38 C39 C40 C41: "Capacitor"
C25 C42 C43: library part Cap, "Capacitor"
Cb18 Cb19 Cb20 Cb21 Cb22 Cb23 Cb24 Cb25 Cb26 Cb27 Cb28 Cb29 Cb30 Cb31 Cb32 Cb33 Cb34 Cb35 Cb36 Cb37 Cb38 Cb39 Cb40 Cb41 Cb42 Cb43 Cb44 Cb45 Cb46: library part Cap, "CAP CER 22UF 10V X5R 0603"
D1 D2 D3 D4 D5: "Typical BLUE SiC LED"
L1: library part L0402-15n, "High frequency chip inductor ±10%"
L2: library part L0603-10µ, "Chip inductor, IDC,min = 50 mA, ±20%"
L3: library part L0402-3n9, "High frequency chip inductor ±5%"
P1 P4: "Header, 6-Pin"
P2 P3: "Header, 16-Pin, Dual row"
P5: "Header, 2-Pin"
R1 R2 R13 R14 R15 R16 R17 R18 R19 R20 R21 R22 R23 R24 R25 R26 R27 R28 R29 R30 R31 R32 R33 R34 R35 R36 R37 R38 R39 R40 R43 R44 R45 R57 R58 R59 R60 R61 R62 R63 R64 R65 R66 XX1: library part Res3, "Resistor"
R4 R5 R49: library part Res2, "Resistor"
R41 R42 R46 R47 R48: "Resistor"
U1 U5 U7 U8 U9: "Linear Regulator"
U4: library part nRF52832-QFAB, "Multi-protocol Bluetooth Low Energy, ANT and 2.4GHz proprietary system-on-chip"
U6: "Regulator"
X1: library part XTAL_SMD2016_32MHz_8pF_General, "XTAL SMD 2016, 32MHz, Cl=8pF, Total Tol: ±40ppm"
X2: library part XTAL_SMD3215_32.768kHz_9pF_General, "XTAL SMD 3215, 32.768kHz, Cl=9pF, Total Tol: ±50ppm"
XX2 XX3: library part L0402-N.C., "Not mounted"
YW2 YW3: library part SIT-OSC32KHZ-SIT1533AC-H5-DCC-32.768, "20 ppm, Ultra-Low Power 32.768 kHz Quartz XTAL Replacement"

## Via types
v1: diameter 16, hole 8, Top Layer to Bottom Layer, tented both sides, 135 vias
v2: diameter 19.68, hole 7.87, Top Layer to Bottom Layer, 72 vias
v3: diameter 20, hole 10, Top Layer to Bottom Layer, tented both sides, 60 vias
v4: diameter 25.98, hole 12.99, Top Layer to Bottom Layer, 16 vias
v5: diameter 16, hole 8, Top Layer to Bottom Layer, 14 vias
v6: diameter 20, hole 10, Top Layer to Bottom Layer, 8 vias

## Nets (pads, with @x,y where several pads share a name; then routed paths per layer and width w, separated by ;. In a path a pad name is that pad's centre, name@x,y a point inside that pad or via, vN(x,y) a via of type N, cw(c..) or ccw(c..) an arc to the next point about the centre after c; other vN are vias at no path point)
DEC1: C2.1 U4.1 | length 88.7
  Top Layer w8: U4.1@1506.09,2467.39 1517.93,2467.39 C2.1@1572.32,2413
DEC2: C10.2 U4.32 | length 131.4
  Top Layer w8: C10.2@1138.69,2525 1144.06,2530.38 U4.32@1267.91,2530.38
DEC3: C9.1 U4.33 | length 137.7
  Top Layer w8: C9.1@1144.56,2480 1179.19,2514.63 U4.33@1267.91,2514.63
DEC4: C1.2 L1.1 U4.46 | length 164.3
  Top Layer w8: C1.2@1401,2332.57 1456.87,2332.57 1456.87,2345.13 1442.12,2359.88 U4.46@1442.12,2434.91
GND: C1.1 C2.2 C3.2 C4.2 C5.2 C6.2 C7.2 C8.2 C9.2 C10.1 C11.1 C12.2 C13.2 C14.2 C15.2 C16.1 C17.2 C18.1 C19.2 C20.1 C21.1 C22.1 C23.1 C24.1 C25.2 C26.2 C27.1 C28.1 C29.1 C30.1 C31.2 C32.2 C33.2 C34.2 C35.2 C36.2 C37.2 C38.2 C39.2 C40.2 C41.2 C42.2 C43.2 Cb18.1 Cb19.1 Cb20.1 Cb21.1 Cb22.1 Cb23.1 Cb24.1 Cb25.1 Cb26.1 Cb27.1 Cb28.1 Cb29.1 Cb30.1 Cb31.1 Cb32.1 Cb33.1 Cb34.1 Cb35.1 Cb36.1 Cb37.1 Cb38.1 Cb39.1 Cb40.1 Cb41.1 Cb42.1 Cb43.1 Cb44.1 Cb45.1 Cb46.1 D1.2 D2.2 D3.2 D4.2 D5.2 P1.6 P2.1 P2.3 P2.4 P2.5 P2.7 P2.9 P2.11 P2.13 P2.14 P2.15 P2.17 P2.19 P2.20 P2.21 P2.23 P2.25 P2.27 P2.29 P2.31 P3.1 P3.3 P3.4 P3.5 P3.7 P3.9 P3.11 P3.13 P3.14 P3.15 P3.17 P3.19 P3.20 P3.21 P3.23 P3.25 P3.27 P3.29 P3.31 P4.4 P4.6 P5.2 R43.2 R44.2 R45.2 U1.2 U2.15 U2.17 U2.19 U2.57 U3.15 U3.17 U3.19 U3.57 U4.31 U4.45 U4.49 U5.2 U6.2 U7.2 U8.2 U9.2 X1.2 X1.4 XX2.2 XX3.2 YW2.2 YW3.2 | length 5382.5
  Top Layer w6: v1(1591,508) 1605.06,522.06 YW3.2@1605.06,546.28
  Top Layer w8: U4.31@1267.91,2546.13 1379.13,2546.13 U4.49@1387,2554 ; v1(1417,2400) 1426.37,2409.37 U4.45@1426.37,2434.91
  Top Layer w10: XX3.2@984,2658.7 v3(984,2707) ; v6(1019,2439) C6.2@1056.31,2439 ; XX2.2@1031,2659.7 1048.3,2677 v6(1058,2677) ; v6(1057,2480) C9.2@1105.19,2480 ; v6(1057,2523) C10.1@1105.2,2523 ; v3(1061,2281) C3.2@1105.19,2281 ; v3(1062,2334) 1062.54,2333.46 X1.2@1099.3,2333.46 ; D1.2@1073.53,2085 v1(1114,2085) ; X1.4@1144.58,2390.54 1169.03,2415 v6(1181,2415) ; C11.1@1174,2603.68 v6(1174,2642) ; v5(1202,862) Cb40.1@1262.91,862 ; v5(1206,807) Cb41.1@1262.46,807 ; D2.2@1243.53,2085 v1(1293,2085) ; v3(1249,2228) C5.2@1249,2280.43 ; v3(1395,2226) 1398,2229 C1.1@1398,2269.43 ; v1(1559,1260) 1560,1259 Cb39.1@1560,1215.54 ; C12.2@1569,2296.31 1569,2242 v3(1570,2241) ; v1(1579,1917) 1580,1916 R43.2@1626.31,1916 1625.31,1915 R45.2@1625.31,1819 ; v3(1611,2380) 1611.69,2379.31 C2.2@1611.69,2413 ; Cb38.1@1617,1214.54 v1(1617,1261) ; C8.2@1629.69,2683 1674,2683 v3(1675,2684) ; U3.19@1647.21,1026.45 1647.21,1079.79 v1(1647.79,1079.79) ; U3.17@1686.58,1026.45 1686.58,1078.58 v1(1687,1079) ; Cb24.1@1688,504 1697,495 1697,464 v1(1705,456) ; U3.15@1725.95,1026.45 1725.95,1046.95 1750,1071 v1(1770,1071) ; C7.2@1727.69,2582 1729.69,2580 1730.69,2581 v3(1768,2581) ; C4.2@1728.69,2391 v3(1771,2391) ; v1(1737,1181) 1737.54,1180.46 Cb32.1@1737.54,1140 ; v1(1783,109) 1784,110 Cb44.1@1784,152.46 ; v1(1808,365) 1808.46,365.46 Cb45.1@1808.46,412 ; v5(1818,754) 1819,753 1819,735.54 Cb25.1@1842,712.54 ; v1(1825,2199) 1825.56,2198.44 C27.1@1877,2198.44 ; Cb33.1@1841.54,1125 v1(1881,1125) ; v1(1861,1485) 1861.47,1484.53 C33.2@1861.47,1441 ; v5(1940,759) 1940.54,758.46 Cb28.1@1940.54,712 ; v1(1943,362) C32.2@1943,406.47 ; v5(1996,760) 1996.46,759.54 Cb27.1@1996.46,712 ; U9.2@2003,2247.24 2017.59,2261.83 v1(2017.59,2309.59) ; Cb46.1@2021,1497.54 2070.54,1497.54 v1(2071,1498) ; C28.1@2090.56,1778 2158,1778 v1(2160,1780) ; C29.1@2090.56,1910 v1(2159,1910) ; C30.1@2091.56,1850 2160,1850 v1(2161,1851) ; v1(2094,2096) C39.2@2094,2144.47 ; Cb36.1@2100.46,714 2117,730.54 v5(2117,760) ; v1(2122,585) 2122,603.54 Cb18.1@2140.46,622 ; v1(2184,1067) 2219,1032 Cb34.1@2248.46,1032 ; v1(2290,2095) C38.2@2290,2146.47 ; v1(2306,2738) 2306.47,2738.47 D5.2@2347,2738.47 ; Cb31.1@2336.54,1137 2342,1142.46 v1(2342,1202) ; C31.2@2358,196.47 2358,153 v1(2359,153) ; v1(2359,1691) 2360,1690 C26.2@2427.47,1690 ; v1(2362,2086) C37.2@2362,2143.47 ; v1(2378,2392) 2379,2391 C43.2@2379,2345.53 ; Cb21.1@2390.54,717 2390.54,750.32 v2(2403.96,763.73) ; Cb42.1@2480.54,2534 2480.54,2482.46 v1(2481,2482) ; C15.2@2481.53,2679 2481.53,2722.53 v1(2483,2724) ; v1(2494,2244) U8.2@2538.24,2244 ; Cb43.1@2559,1807.54 v1(2604.46,1807.54) ; v1(2559,2548) 2559.47,2548.47 C13.2@2655,2548.47 ; v1(2600,2108) C41.2@2600,2152.47 ; v1(2687,2106) 2688,2107 C36.2@2688,2148.47 ; v1(2703,2751) U7.2@2750.24,2751 ; C25.2@2712.53,2875 2764,2875 v1(2764,2874) ; v1(2862,1966) 2863,1967 C34.2@2863,2021.47 ; v1(2928,1975) C35.2@2928,2021.47 ; C42.2@2928,2222.53 v1(2928,2267) ; v1(2986,2711) 2987,2712 C18.1@3020,2712 3019.63,2711.63 C17.2@3019.63,2673 ; C19.2@2998.47,2770 2998.47,2814.53 v1(2999,2814) ; C21.1@3093,2437 v3(3127,2437) ; U6.2@3095,2515.76 v3(3095,2559) ; U1.2@3127.24,2121 3173,2121 v1(3174,2120) ; C16.1@3173,2668 v1(3209,2668) ; v1(3212,2879) 3214.53,2876.47 D4.2@3214.53,2838 ; C40.2@3226,2141.53 3287.53,2141.53 v1(3288,2142) ; C23.1@3410.56,2564 v3(3468,2564) ; C24.1@3410.56,2629 C22.1@3410.56,2482 3414.56,2478 v3(3461,2478) ; U5.2@3447.24,2749 3500,2749 v3(3502,2747) ; v3(3526,2556) 3531.47,2561.47 D3.2@3581,2561.47 ; C20.1@3582,2759.56 v3(3582,2813)
  Bottom Layer w6: YW2.2@2322.94,555.28 2322.94,529.06 v1(2335,517)
  Bottom Layer w10: v1(1650,508) 1651,508 1669,526 ; 1670,527 1669,526 ; Cb23.1@1757,562.46 1755,564.46 Cb22.1@1669,564.46 1669,526 ; Cb29.1@1841,1125.54 1880.46,1125.54 v1(1881,1125) ; v1(2043,1070) 2074,1039 Cb26.1@2074.46,1039 ; v1(2077,1115) 2079,1117 Cb30.1@2133.46,1117 ; v1(2122,585) 2143,606 2155,606 Cb19.1@2162,613 ; Cb19.1@2168,621 Cb19.1@2169,622 ; v1(2184,1067) 2196,1067 2211.05,1051.95 U2.15@2211.05,1031.45 ; U2.17@2250.42,1031.45 2250.42,960.58 v2(2274.04,936.96) U2.57@2289.79,921.21 ; U2.19@2289.79,1031.45 U2.57@2289.79,921.21 ; U2.57@2339,872 U2.57@2289.79,921.21 ; v1(2342,1202) 2343,1201 Cb35.1@2343,1161.54 ; Cb20.1@2638.54,846 v1(2714,846) ; Cb37.1@2638.54,893 2698,893 v1(2700,895)
  other v2: 1489.73,758.73 1533.04,758.73 1576.35,758.73 1619.65,758.73 1662.96,758.73 1706.27,758.73 2230.73,763.73 2274.04,763.73 2317.35,763.73 2360.65,763.73 2447.27,763.73 1489.73,802.04 1533.04,802.04 1576.35,802.04 1619.65,802.04 1662.96,802.04 1706.27,802.04 2230.73,807.04 2274.04,807.04 2317.35,807.04 2360.65,807.04 2403.96,807.04 2447.27,807.04 1489.73,845.35 1533.04,845.35 1576.35,845.35 1619.65,845.35 1662.96,845.35 1706.27,845.35 2230.73,850.35 2274.04,850.35 2317.35,850.35 2360.65,850.35 2403.96,850.35 2447.27,850.35 1489.73,888.65 1533.04,888.65 1576.35,888.65 1619.65,888.65 1662.96,888.65 1706.27,888.65 2230.73,893.65 2274.04,893.65 2317.35,893.65 2360.65,893.65 2403.96,893.65 2447.27,893.65 1489.73,931.96 1533.04,931.96 1576.35,931.96 1619.65,931.96 1662.96,931.96 1706.27,931.96 2230.73,936.96 2317.35,936.96 2360.65,936.96 2403.96,936.96 2447.27,936.96 1489.73,975.27 1533.04,975.27 1576.35,975.27 1619.65,975.27 1662.96,975.27 1706.27,975.27 2230.73,980.27 2274.04,980.27 2317.35,980.27 2360.65,980.27 2403.96,980.27 2447.27,980.27
  other v4: 1316.13,2483.13 1363.38,2483.13 1410.62,2483.13 1457.87,2483.13 1316.13,2530.38 1363.38,2530.38 1410.62,2530.38 1457.87,2530.38 1316.13,2577.62 1363.38,2577.62 1410.62,2577.62 1457.87,2577.62 1316.13,2624.87 1363.38,2624.87 1410.62,2624.87 1457.87,2624.87
NetA1_1: A1.1 XX1.2 XX3.1 | length 133.8
  Top Layer w8: 893,2573 XX1.2@985.44,2573 978,2580.44 XX3.1@978,2611.3
NetC11_2: C11.2 L3.1 U4.30 | length 148.8
  Top Layer w8: L3.1@1123,2571.31 C11.2@1174,2571.31 1183.44,2561.87 U4.30@1267.91,2561.87
NetC13_1: C13.1 C14.1 L4.1 U7.5 | length 286.2
  Top Layer w10: L4.1@2480.56,2611 2597.53,2611 C14.1@2600,2608.53 2601,2607.53 C13.1@2655,2607.53 ; U7.5@2655.76,2713.6 2655.76,2608.28 C13.1@2655,2607.53 ; C13.1@2658.91,2607.53 C13.1@2655,2607.53
NetC16_2: C16.2 U6.4 | length 56.5
  Top Layer w10: U6.4@3132.4,2610.24 C16.2@3132.4,2666.77
NetC25_1: C25.1 U7.4 | length 87.5
  Top Layer w10: C25.1@2653.47,2875 2653.47,2790.68 U7.4@2655.76,2788.4
NetC27_2: C27.2 U9.3 | length 91.2
  Top Layer w8: C27.2@1877,2253.56 1883.31,2247.24 U9.3@1965.6,2247.24
NetC34_1: C34.1 C35.1 L10.1 U1.5 | length 320.3
  Top Layer w6: L10.1@2798.56,2206 2798.56,2148.44 2867,2080 2927.47,2080 C35.1@2928,2080.53 ; C35.1@2928,2083.6 U1.5@3032.76,2083.6
NetC36_1: C36.1 C41.1 L10.2 R5.2 U8.1 | length 248.1
  Top Layer w6: U8.1@2538.24,2206.6 2543.65,2212 v1(2638,2212) 2642.47,2207.53 C36.1@2688,2207.53
  Top Layer w12: C36.1@2688,2207.53 2689.53,2206 L10.2@2743.44,2206
  Bottom Layer w6: R5.2@2600,2212.47 2600.47,2212 v1(2638,2212)
NetC37_1: C37.1 C38.1 L11.1 U8.5 | length 214.5
  Top Layer w6: L11.1@2231.56,2201 2438.16,2201 U8.5@2443.76,2206.6
NetC39_1: C39.1 L11.2 U9.1 | length 163.2
  Top Layer w6: U9.1@2040.4,2247.24 2040.4,2233.6 2071.47,2202.53 C39.1@2096,2202.53 2174.91,2202.53 L11.2@2176.44,2201
NetC42_1: C42.1 U1.4 | length 99.7
  Top Layer w6: C42.1@2933.07,2158.4 U1.4@3032.76,2158.4
NetC43_1: C43.1 U8.4 | length 59.7
  Top Layer w6: C43.1@2384.07,2281.4 U8.4@2443.76,2281.4
NetCb18_2: Cb18.2 R60.2 U2.56 | length 173.1
  Top Layer w6: v1(2184,665) 2184,577.53 2201,560.53 R60.2@2199,558.53
  Bottom Layer w6: v1(2184,665) 2184,673 2211.05,700.05 U2.56@2211.05,712.55
NetCb19_2: Cb19.2 R59.2 U2.55 | length 189.2
  Top Layer w6: R59.2@2260,545 R59.2@2273,545 ; R59.2@2262,583 v1(2262,615)
  Bottom Layer w6: Cb19.2@2224,615 v1(2262,615) ; Cb19.2@2226.09,622 2213,635.09 2213,682.02 2229.98,699 U2.55@2231.37,699 ; U2.55@2230.73,699 U2.55@2230.73,712.55 U2.55@2232,711.28
NetCb24_2: Cb24.2 R58.2 U3.55 | length 179.5
  Top Layer w6: Cb24.2@1693,566 1711,584 R58.2@1753.53,584
  Top Layer w8: U3.55@1706.27,707.55 1706.27,677.73 1752,632 R58.2@1752,615
NetCb25_2: Cb25.2 R57.2 U3.56 | length 213.9
  Top Layer w8: U3.56@1726.87,693.05 1726.87,706.64 U3.56@1725.95,707.55 1782.45,707.55 1838,652 R57.2@1838,588
NetCb27_2: Cb27.2 R61.2 U2.5 | length 251.3
  Top Layer w8: R61.2@2064,653.15 2064,763 v5(2064,765)
  Bottom Layer w8: v5(2064,765) 2121.79,822.79 U2.5@2179.55,822.79
NetCb28_2: Cb28.2 R62.1 U3.5 | length 285.2
  Top Layer w8: U3.5@1759,818 1829,818 1883.46,763.54 Cb28.2@1883.46,712 1888.53,706.93 1888.53,689.47 1926,652 R62.1@1926,643
NetCb30_2: Cb30.2 R63.1 U2.16 | length 203
  Top Layer w6: R63.1@2217,1155 2217,1146.47 2231,1132.47 v1(2231,1081)
  Bottom Layer w6: U2.16@2230.73,1031.45 2231,1031.72 v1(2231,1081)
  Bottom Layer w8: Cb30.2@2190.54,1117 2226,1117 2231,1112 v1(2231,1081)
NetCb31_2: Cb31.2 R65.2 U2.18 | length 150.4
  Top Layer w6: v1(2272,1092) 2283,1103 R65.2@2283,1176.47
  Bottom Layer w6: U2.18@2270.1,1031.45 2272,1033.35 v1(2272,1092)
NetCb32_2: Cb32.2 R66.2 U3.18 | length 192.4
  Top Layer w6: U3.18@1666.9,1026.45 1666.9,1126.44 Cb32.2@1680.46,1140 1681,1140.54 R66.2@1681,1213
NetCb33_2: Cb33.2 R64.2 U3.16 | length 201.9
  Top Layer w6: U3.16@1706.27,1026.45 1706.27,1056.27 1759,1109 1768.46,1109 Cb33.2@1784.46,1125 1784.46,1176.93 R64.2@1794,1186.47
NetD1_1: D1.1 R42.2 | length 44.6
  Top Layer w8: R42.2@1005,2044.37 1005,2075.53 D1.1@1014.47,2085
NetD2_1: D2.1 R41.2 | length 68.4
  Top Layer w12: D2.1@1184.47,2085 1217.47,2052 1228.37,2052 R41.2@1236,2044.37
NetD3_1: D3.1 R46.2 | length 70.4
  Top Layer w8: D3.1@3581,2620.53 3591.9,2620.53 R46.2@3634,2662.63
NetD4_1: D4.1 R47.2 | length 67.2
  Top Layer w10: D4.1@3150.53,2836 3153.37,2833.16 R47.2@3153.37,2770
NetD5_1: D5.1 R48.2 | length 72.5
  Top Layer w8: D5.1@2347,2797.53 2348.16,2796.37 R48.2@2419,2796.37
NetL1_2: L1.2 L2.1 | length 62
  Top Layer w8: L1.2@1459,2297.3 1479.83,2276.47 L2.1@1512.39,2276.47
NetL2_2: L2.2 U4.47 | length 122
  Top Layer w8: U4.47@1457.87,2434.91 1457.87,2390.05 L2.2@1512.39,2335.53
NetP2_2: P2.2 R20.2 | length 796.1
  Top Layer w6: R20.2@3237,1184 3253,1200 3253,1314 3620,1681 3694,1681 P2.2@3741,1728
NetP2_6: P2.6 R23.2 | length 660.7
  Top Layer w6: R23.2@3243.69,1133.67 3278.67,1133.67 3624,1479 3692,1479 P2.6@3741,1528
NetP2_8: P2.8 R27.2 | length 640.5
  Top Layer w6: R27.2@3243.69,1082.33 3284.33,1082.33 3586,1384 3697,1384 P2.8@3741,1428
NetP2_10: P2.10 R29.2 | length 620.3
  Top Layer w6: R29.2@3243.69,1031 3328,1031 3575,1278 3691,1278 P2.10@3741,1328
NetP2_12: P2.12 R32.2 | length 600.2
  Top Layer w6: R32.2@3243.69,979.67 3374.67,979.67 3574,1179 3692,1179 P2.12@3741,1228
NetP2_16: P2.16 R37.2 | length 538.6
  Top Layer w6: R37.2@3243.69,928.33 3426.33,928.33 3482,984 3697,984 P2.16@3741,1028
NetP2_18: P2.18 R38.2 | length 518.4
  Top Layer w6: R38.2@3243.69,877 3690,877 P2.18@3741,928
NetP2_22: P2.22 R26.2 | length 536.2
  Top Layer w6: R26.2@3246.69,829 3513,829 3566,776 3693,776 P2.22@3741,728
NetP2_24: P2.24 R22.2 | length 559.9
  Top Layer w6: R22.2@3245.69,784 3395,784 3495,684 3685,684 P2.24@3741,628
NetP2_26: P2.26 R21.2 | length 585.1
  Top Layer w6: R21.2@3241.69,735 3304,735 3455,584 3685,584 P2.26@3741,528
NetP2_28: P2.28 R19.2 | length 600.6
  Top Layer w6: R19.2@3247.69,687 3464.69,470 3699,470 P2.28@3741,428
NetP2_30: P2.30 U2.49 | length 1663
  Signal Layer 1 w8: v1(2350,675.46) 2350,675 2400,625 2400,471 2488.5,382.5 3686.5,382.5 P2.30@3741,328
  Bottom Layer w8: U2.49@2348.84,712.55 2348.84,676.61 v1(2350,675.46)
NetP2_32: P2.32 U2.50 | length 1734.6
  Signal Layer 1 w8: v1(2328,672) 2378,622 2378,457 2557,278 3691,278 P2.32@3741,228
  Bottom Layer w8: v1(2328,672) 2329.16,673.16 U2.50@2329.16,712.55
NetP3_2: P3.2 R24.2 | length 365.2
  Top Layer w6: P3.2@773,1723 814.26,1723 R24.2@1043.31,1493.95
NetP3_6: P3.6 R30.2 | length 306.8
  Top Layer w6: P3.6@773,1523 927,1523 1015.15,1434.85 R30.2@1043.31,1434.85
NetP3_8: P3.8 R33.2 | length 289.9
  Top Layer w6: P3.8@773,1423 996.07,1423 R33.2@1043.31,1375.76